# Altium PCB AnchorBoardSmall_SNS.PcbDoc (part 1 of 2)
Units mm, origin at the board's own origin, x right, y up, seen from the top; angles counter-clockwise.
Board outline 52.5 x 37.5 mm, 6 copper layers (Top Layer, Ground, Mid-Layer 2, Mid-Layer 3, Power, Bottom Layer), stack 1.141 mm thick; 164 components, 143 nets, 548 pads, 294 vias.
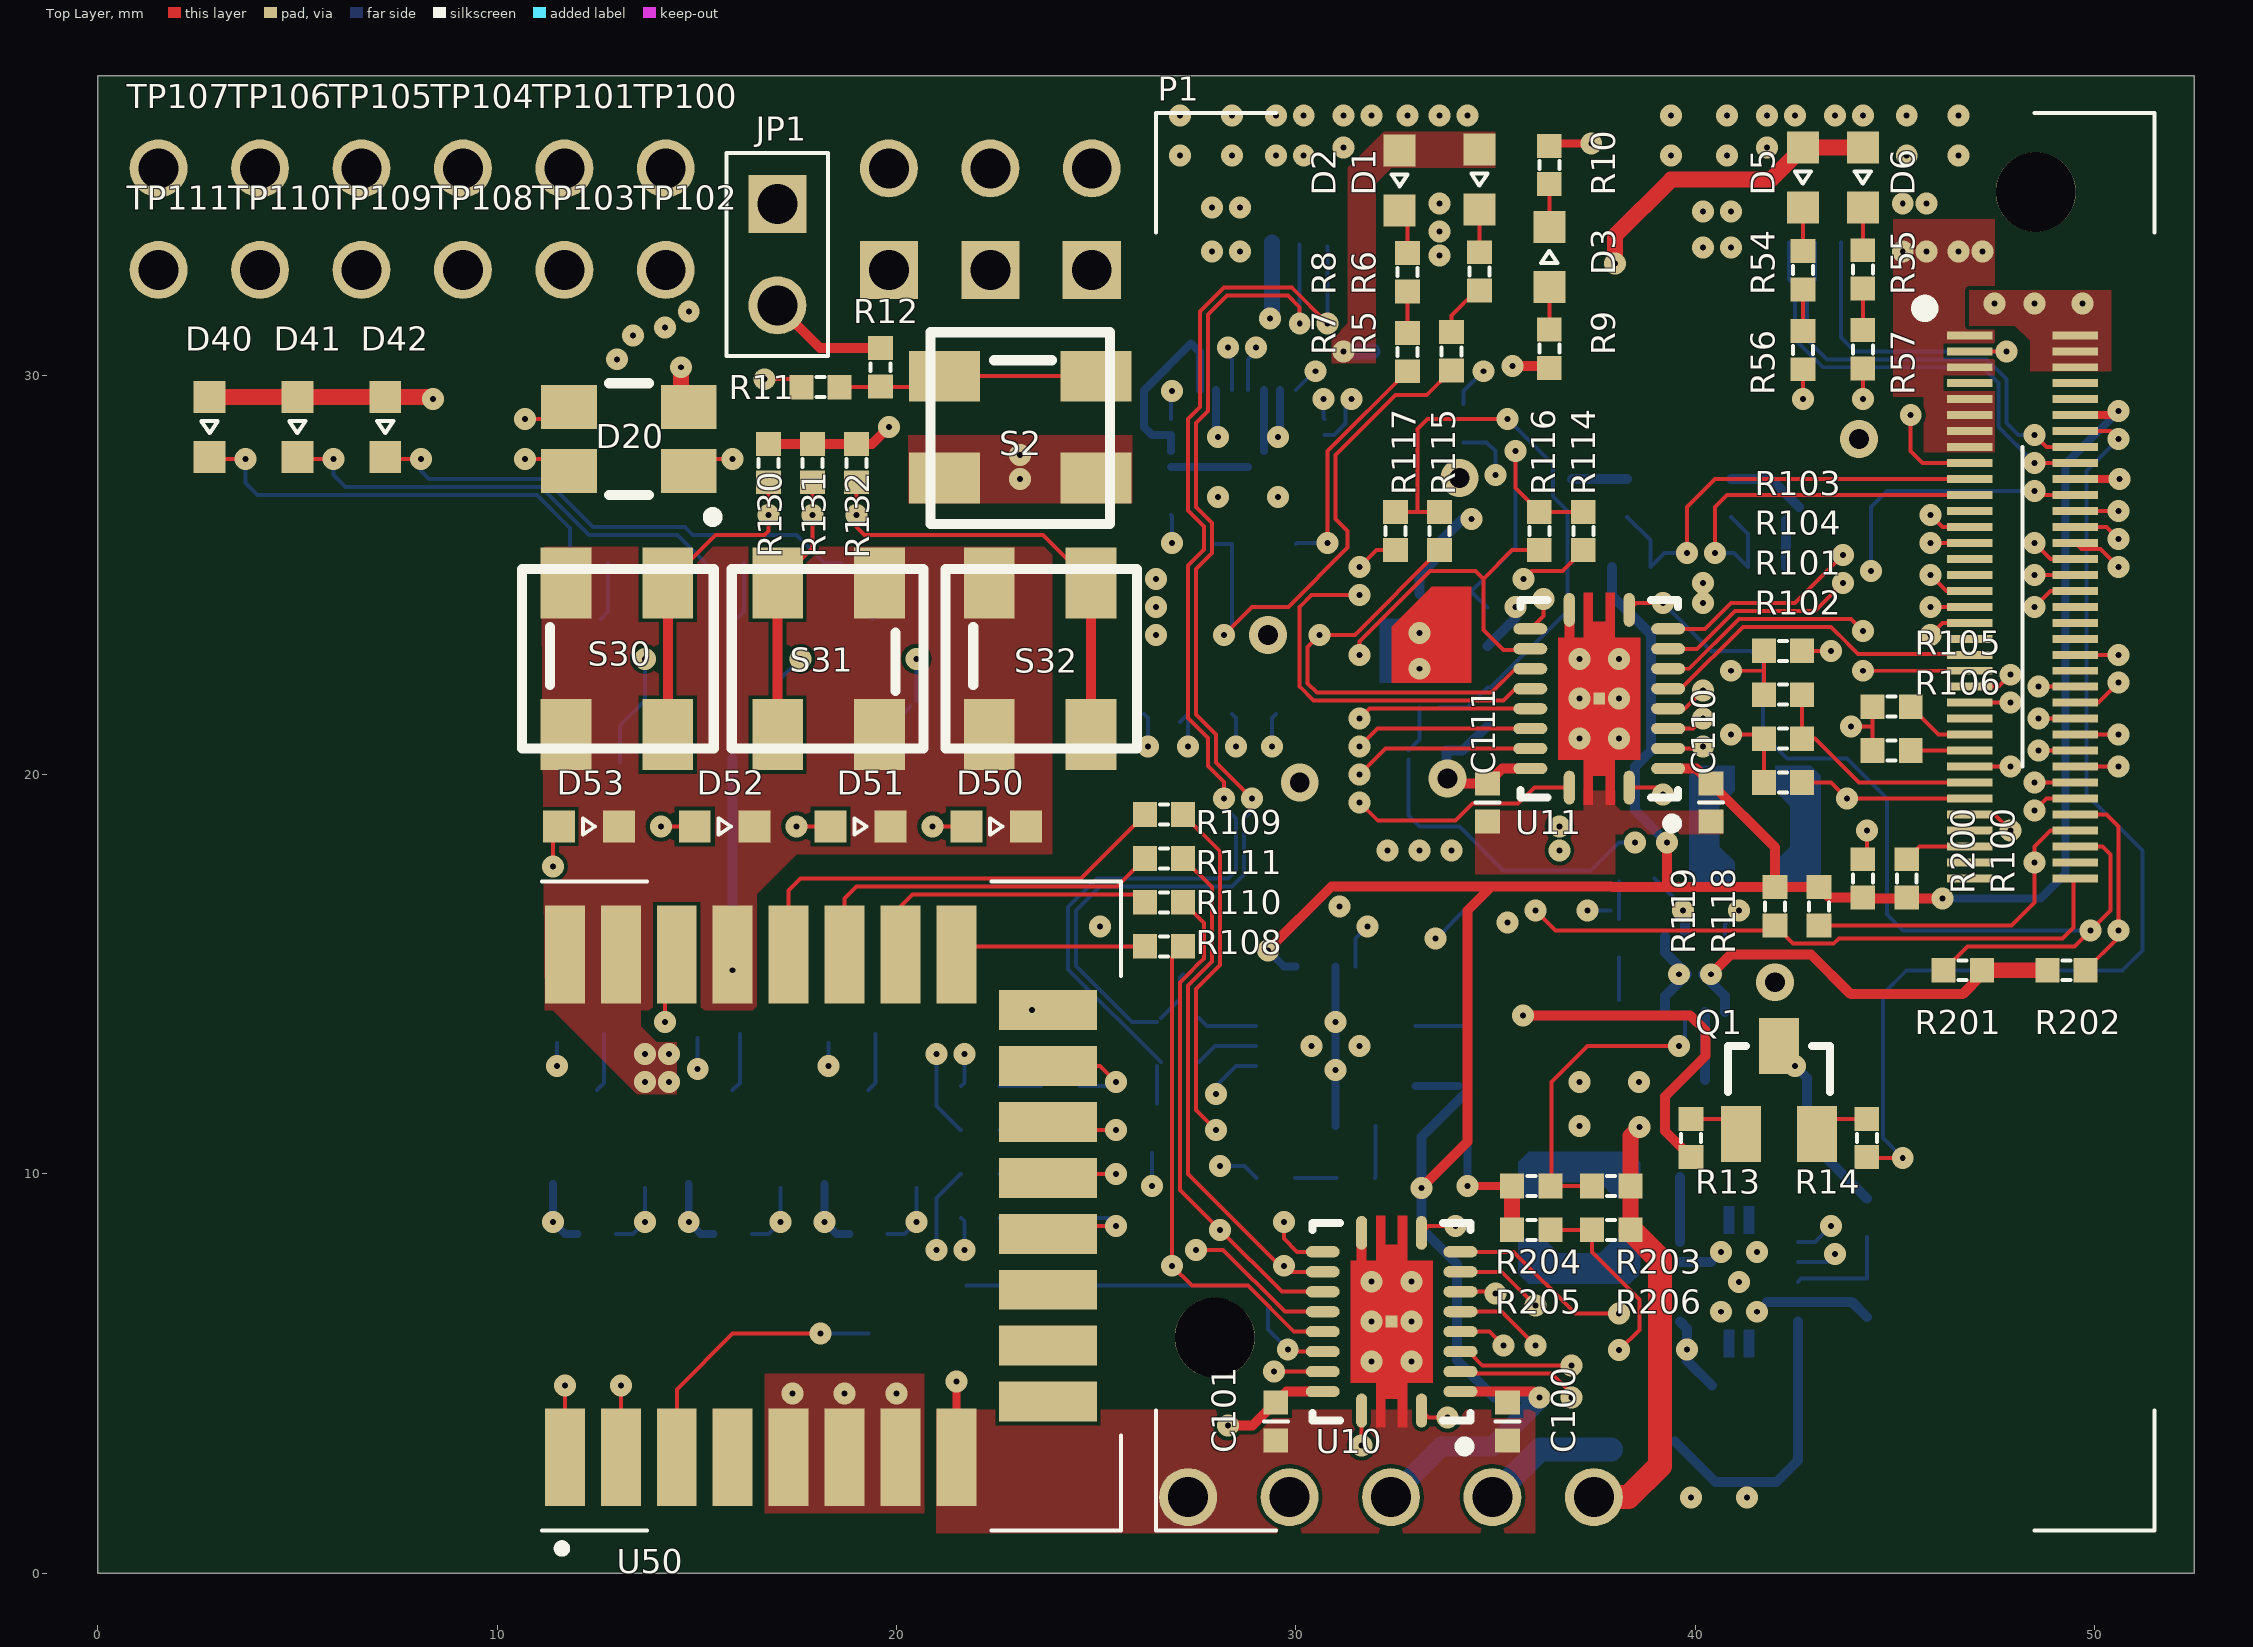
[diagram p0: Top Layer view]
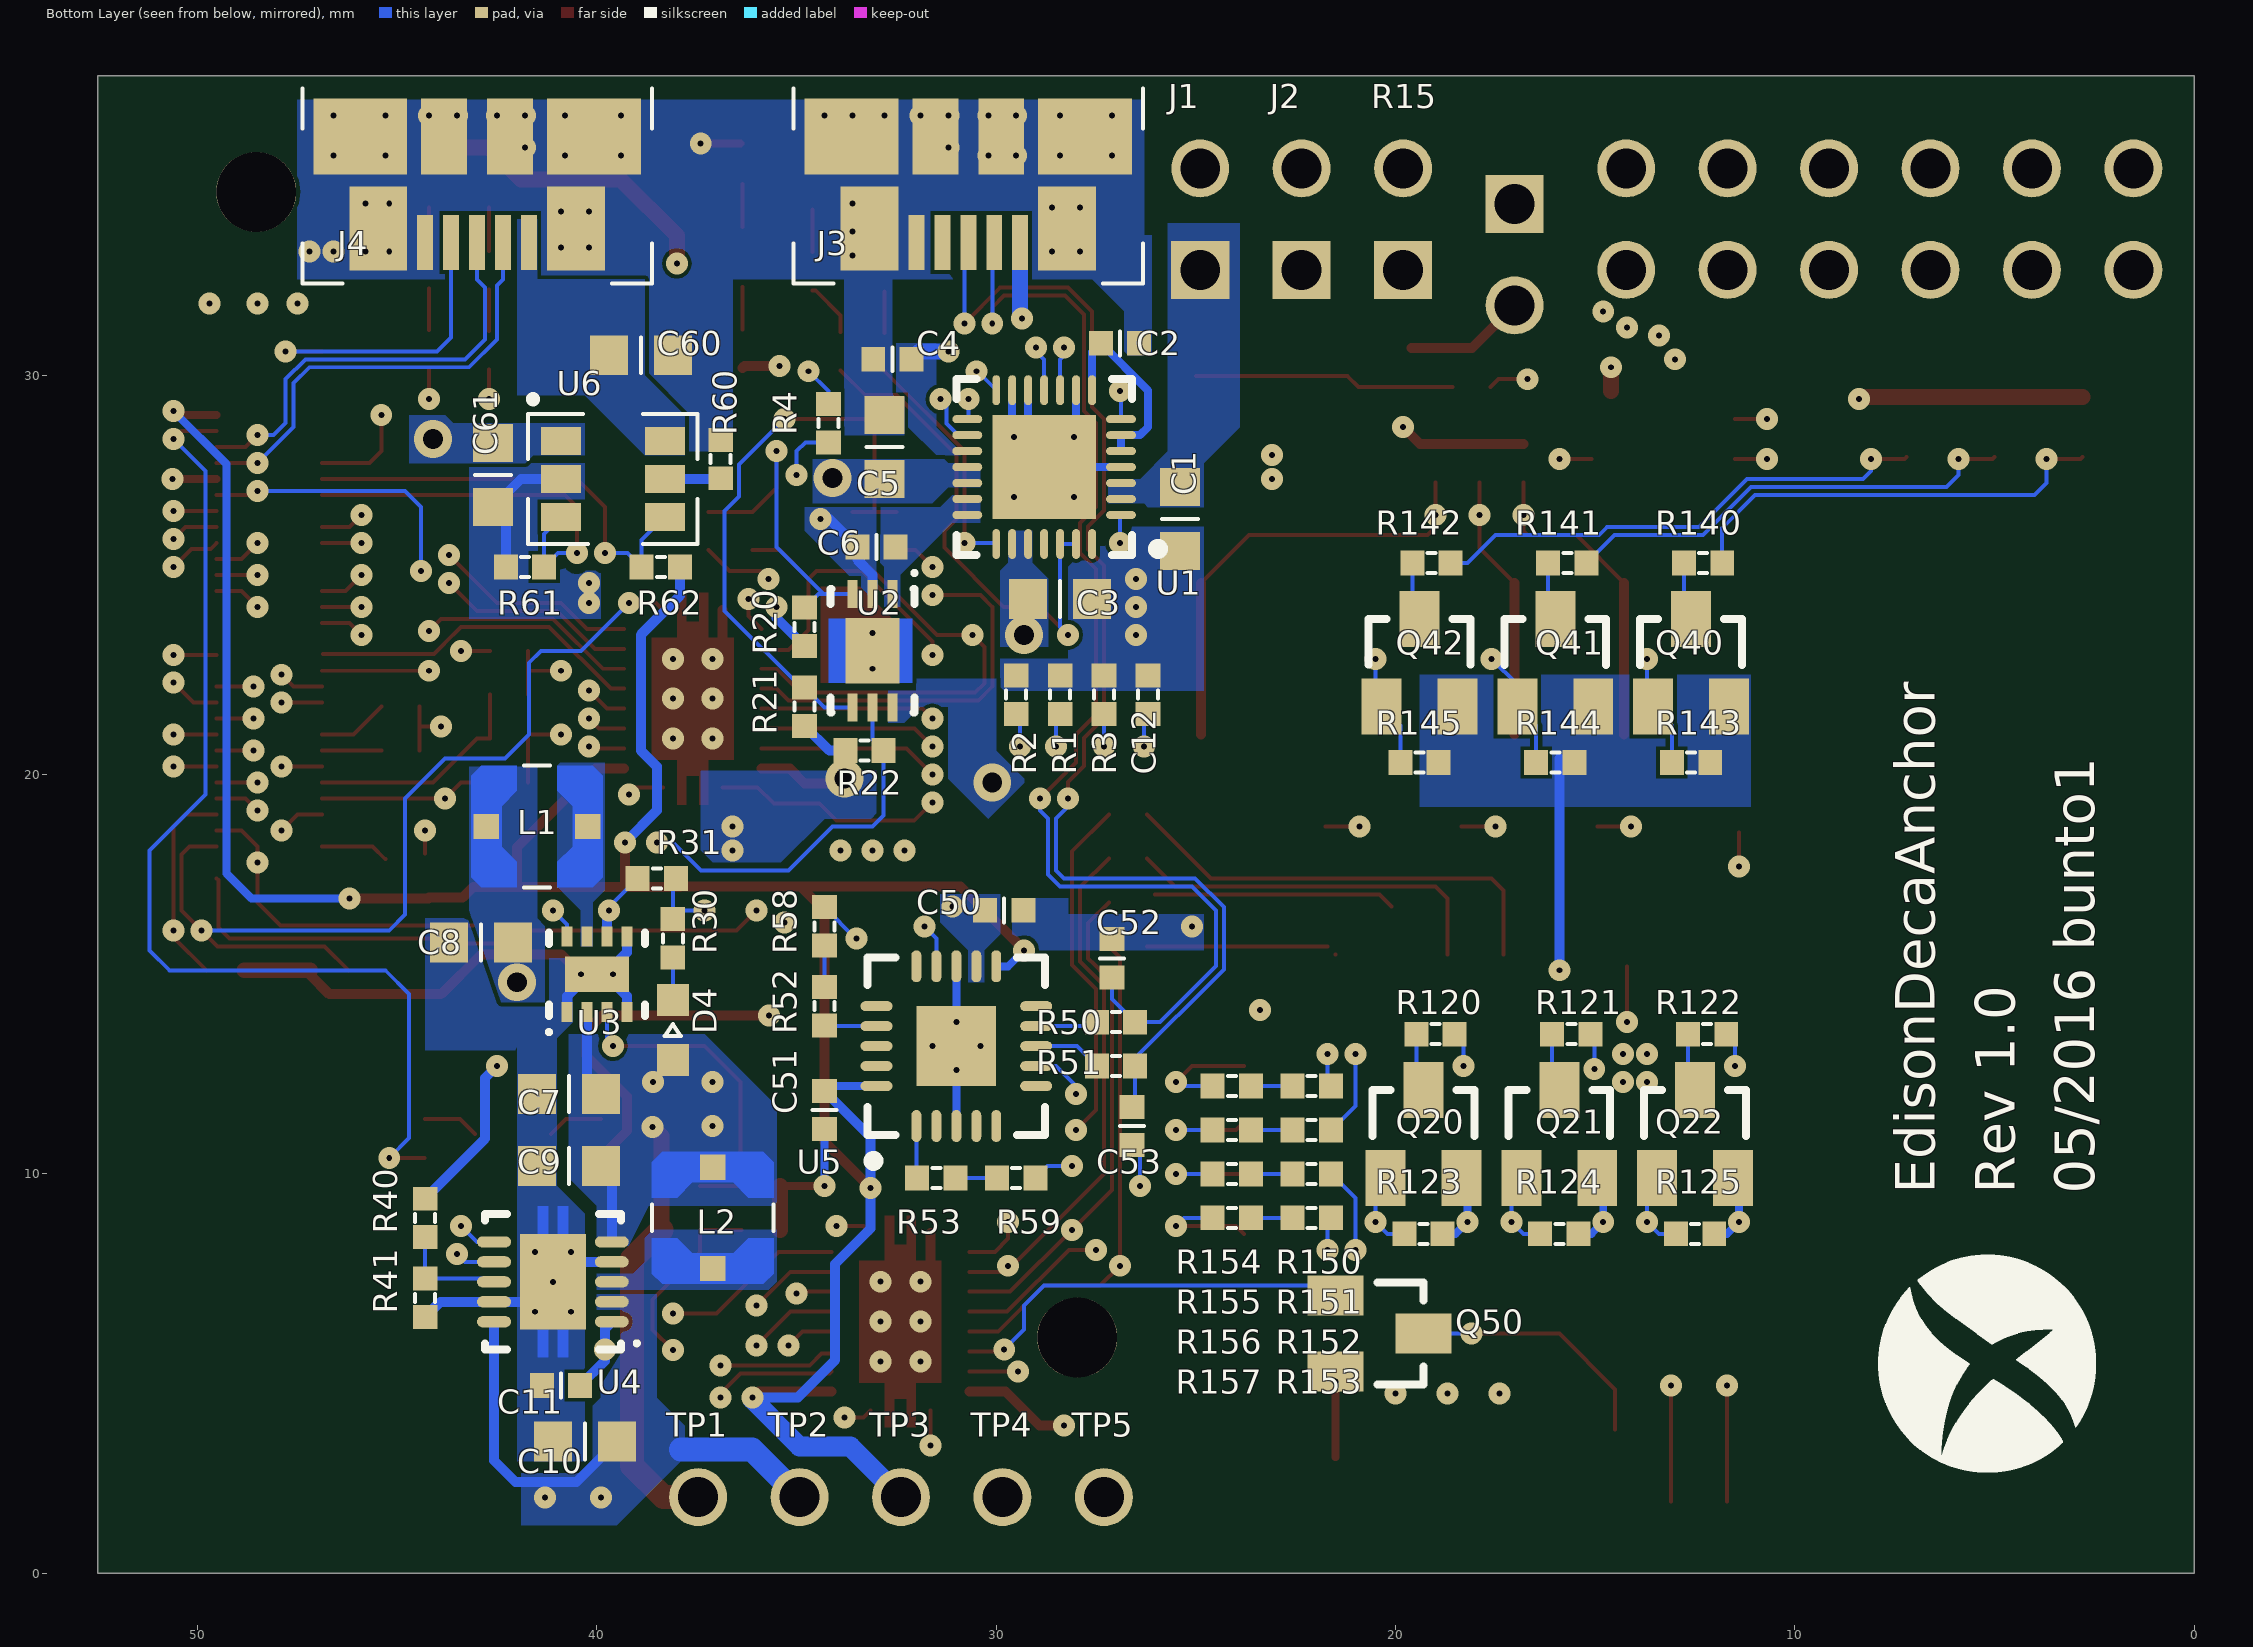
[diagram p1: Bottom Layer view, seen from below]
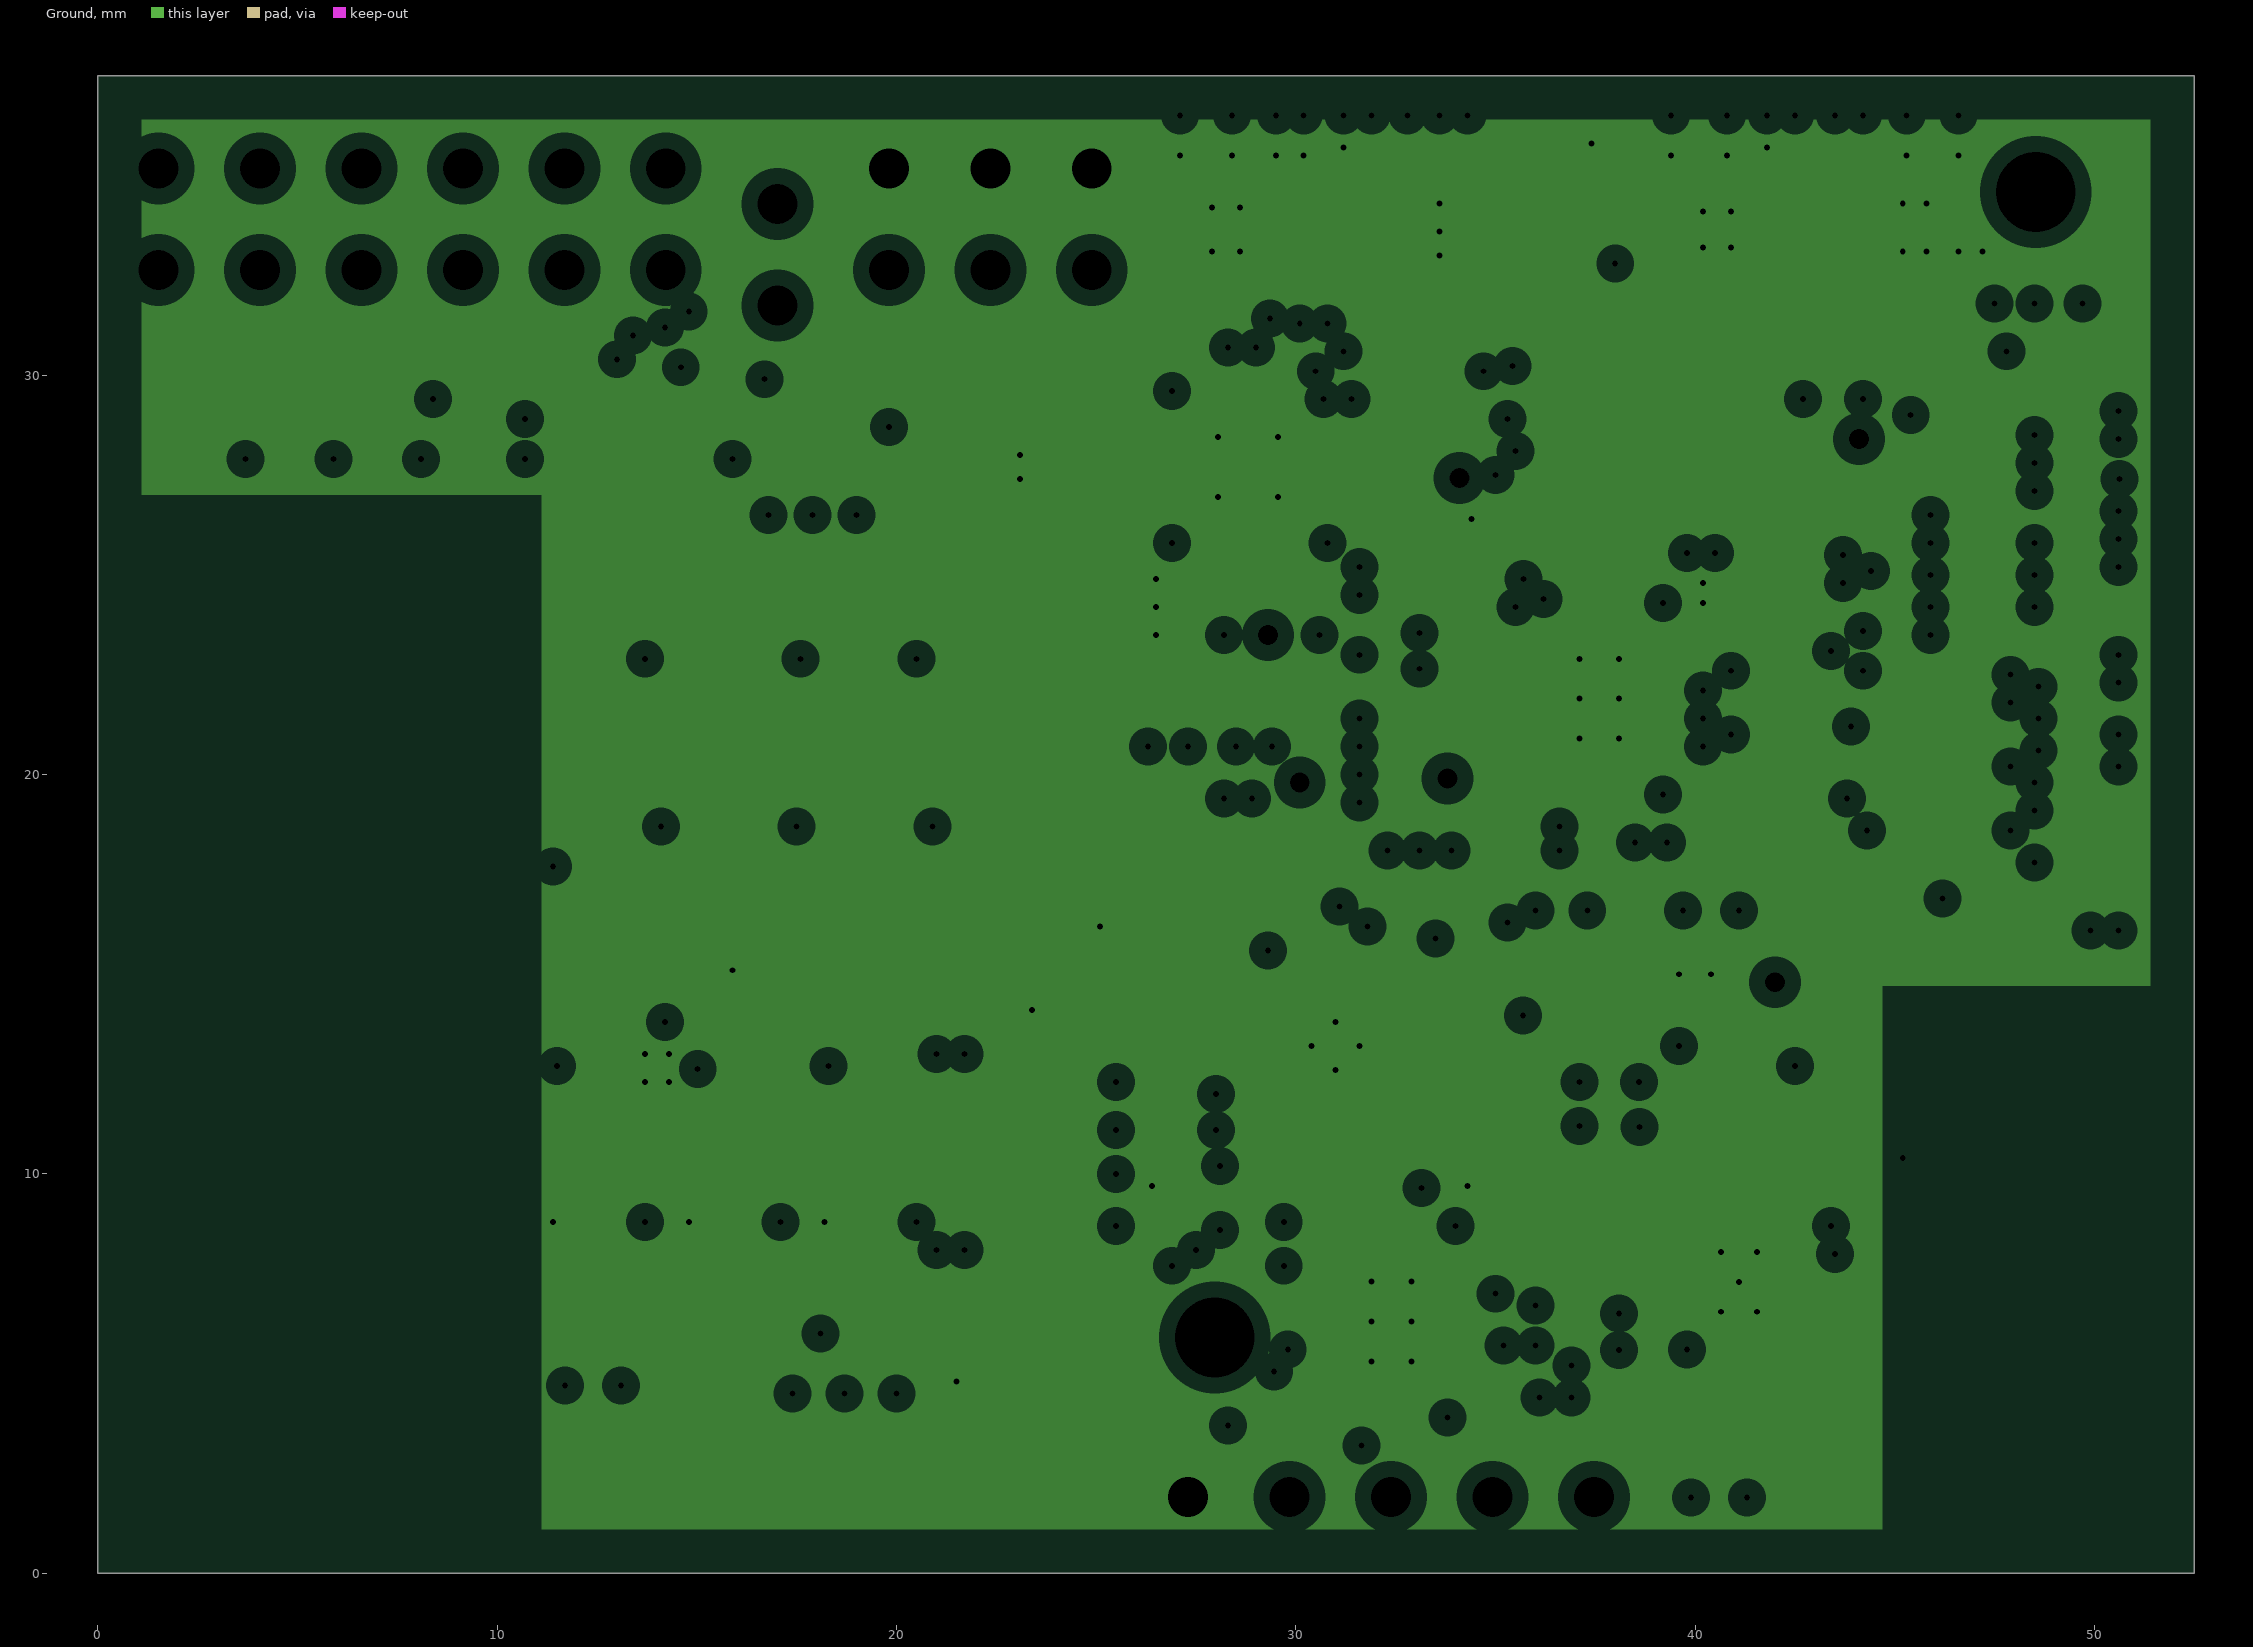
[diagram p2: Ground, clearances drawn from the general rule]
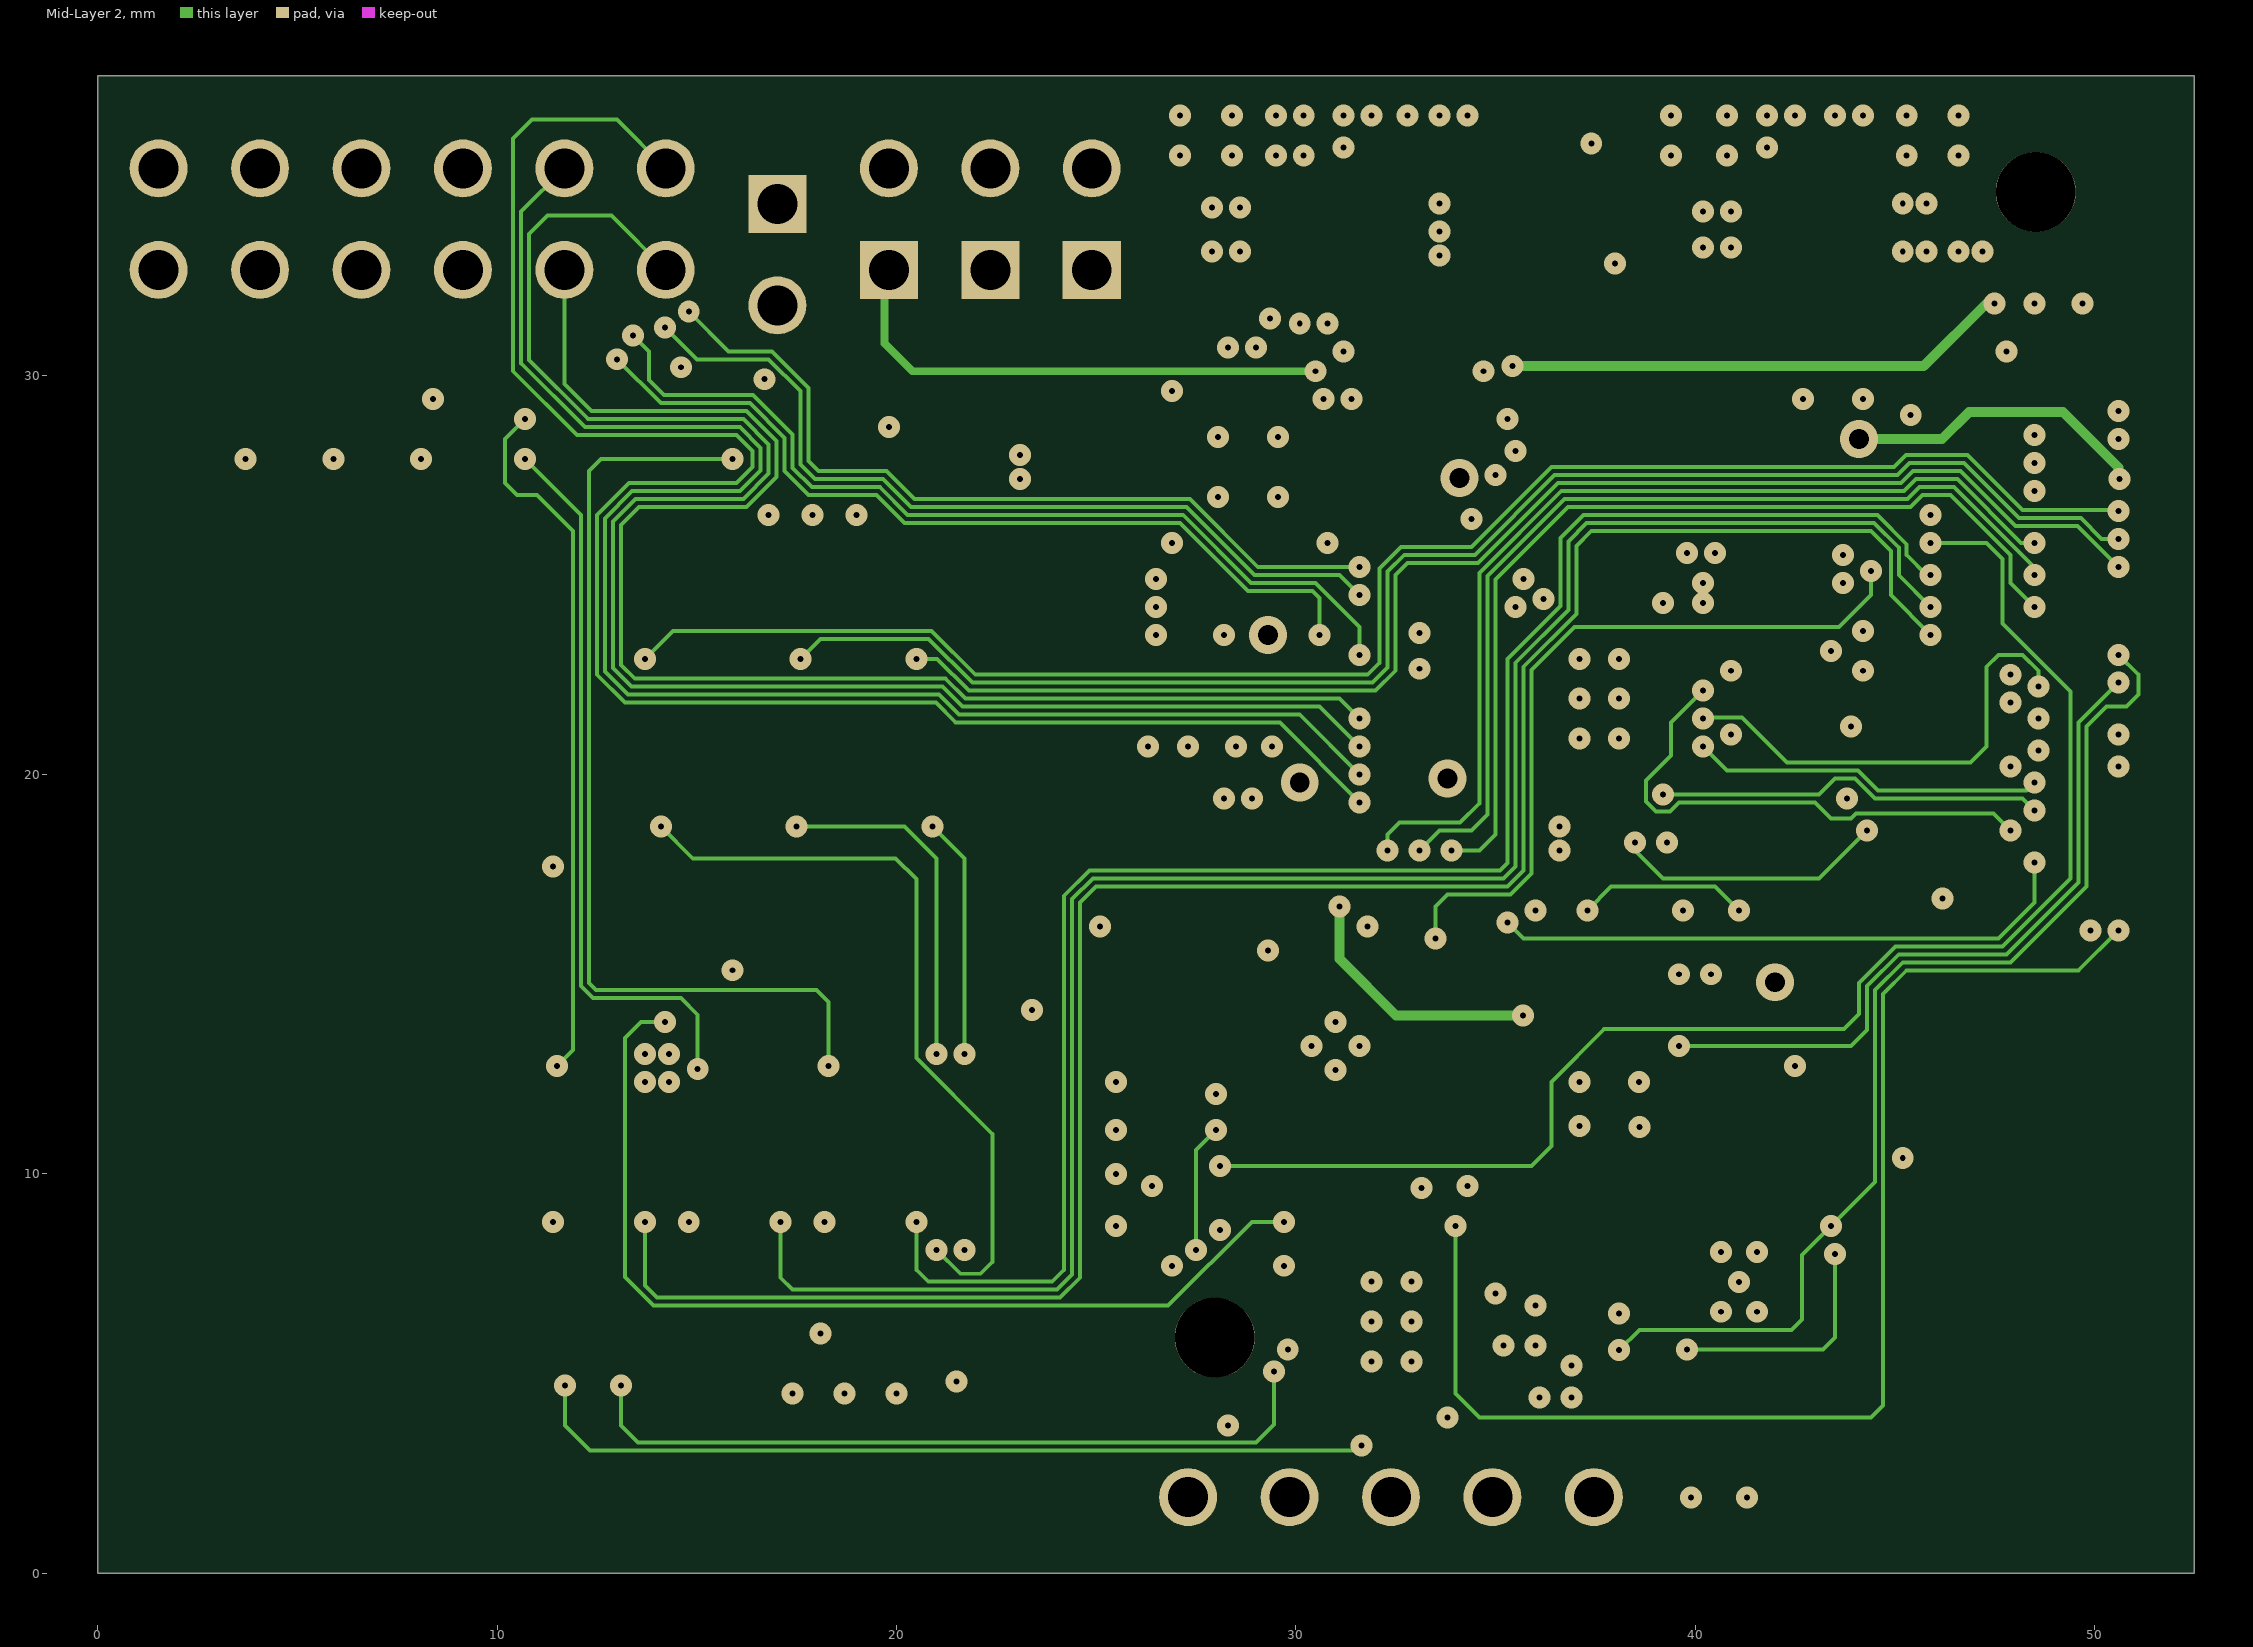
[diagram p3: Mid-Layer 2]
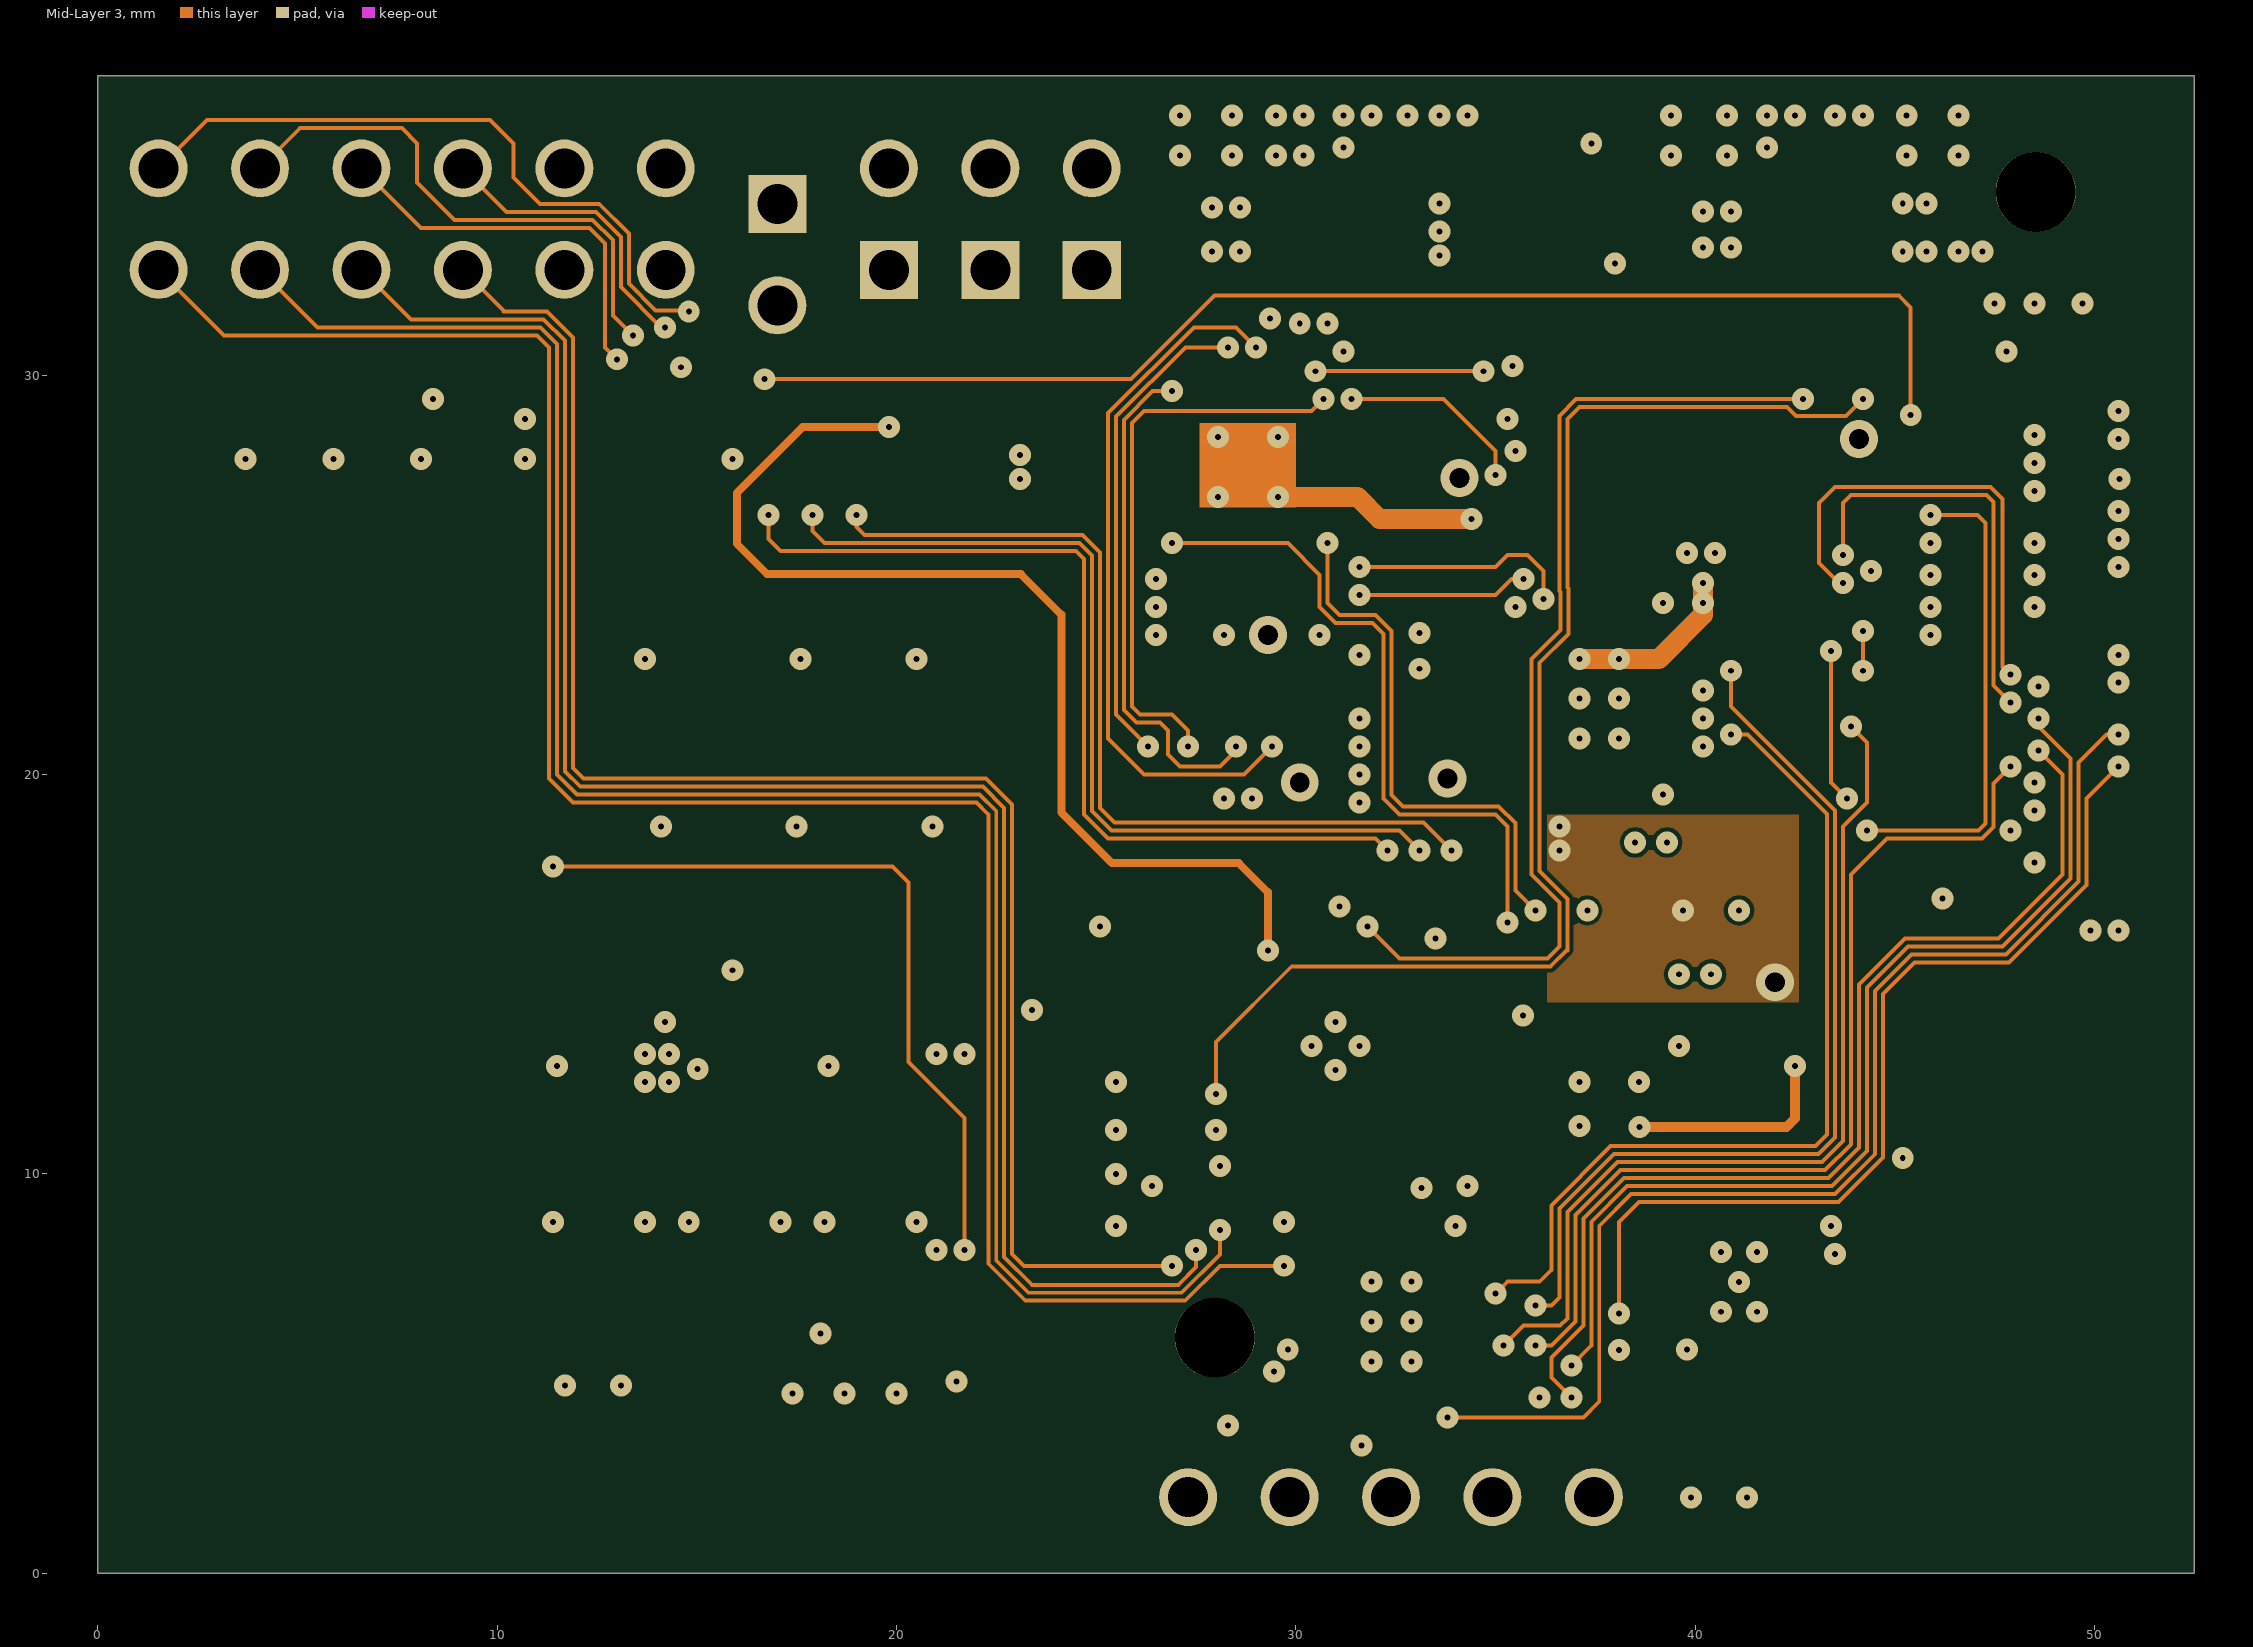
[diagram p4: Mid-Layer 3]
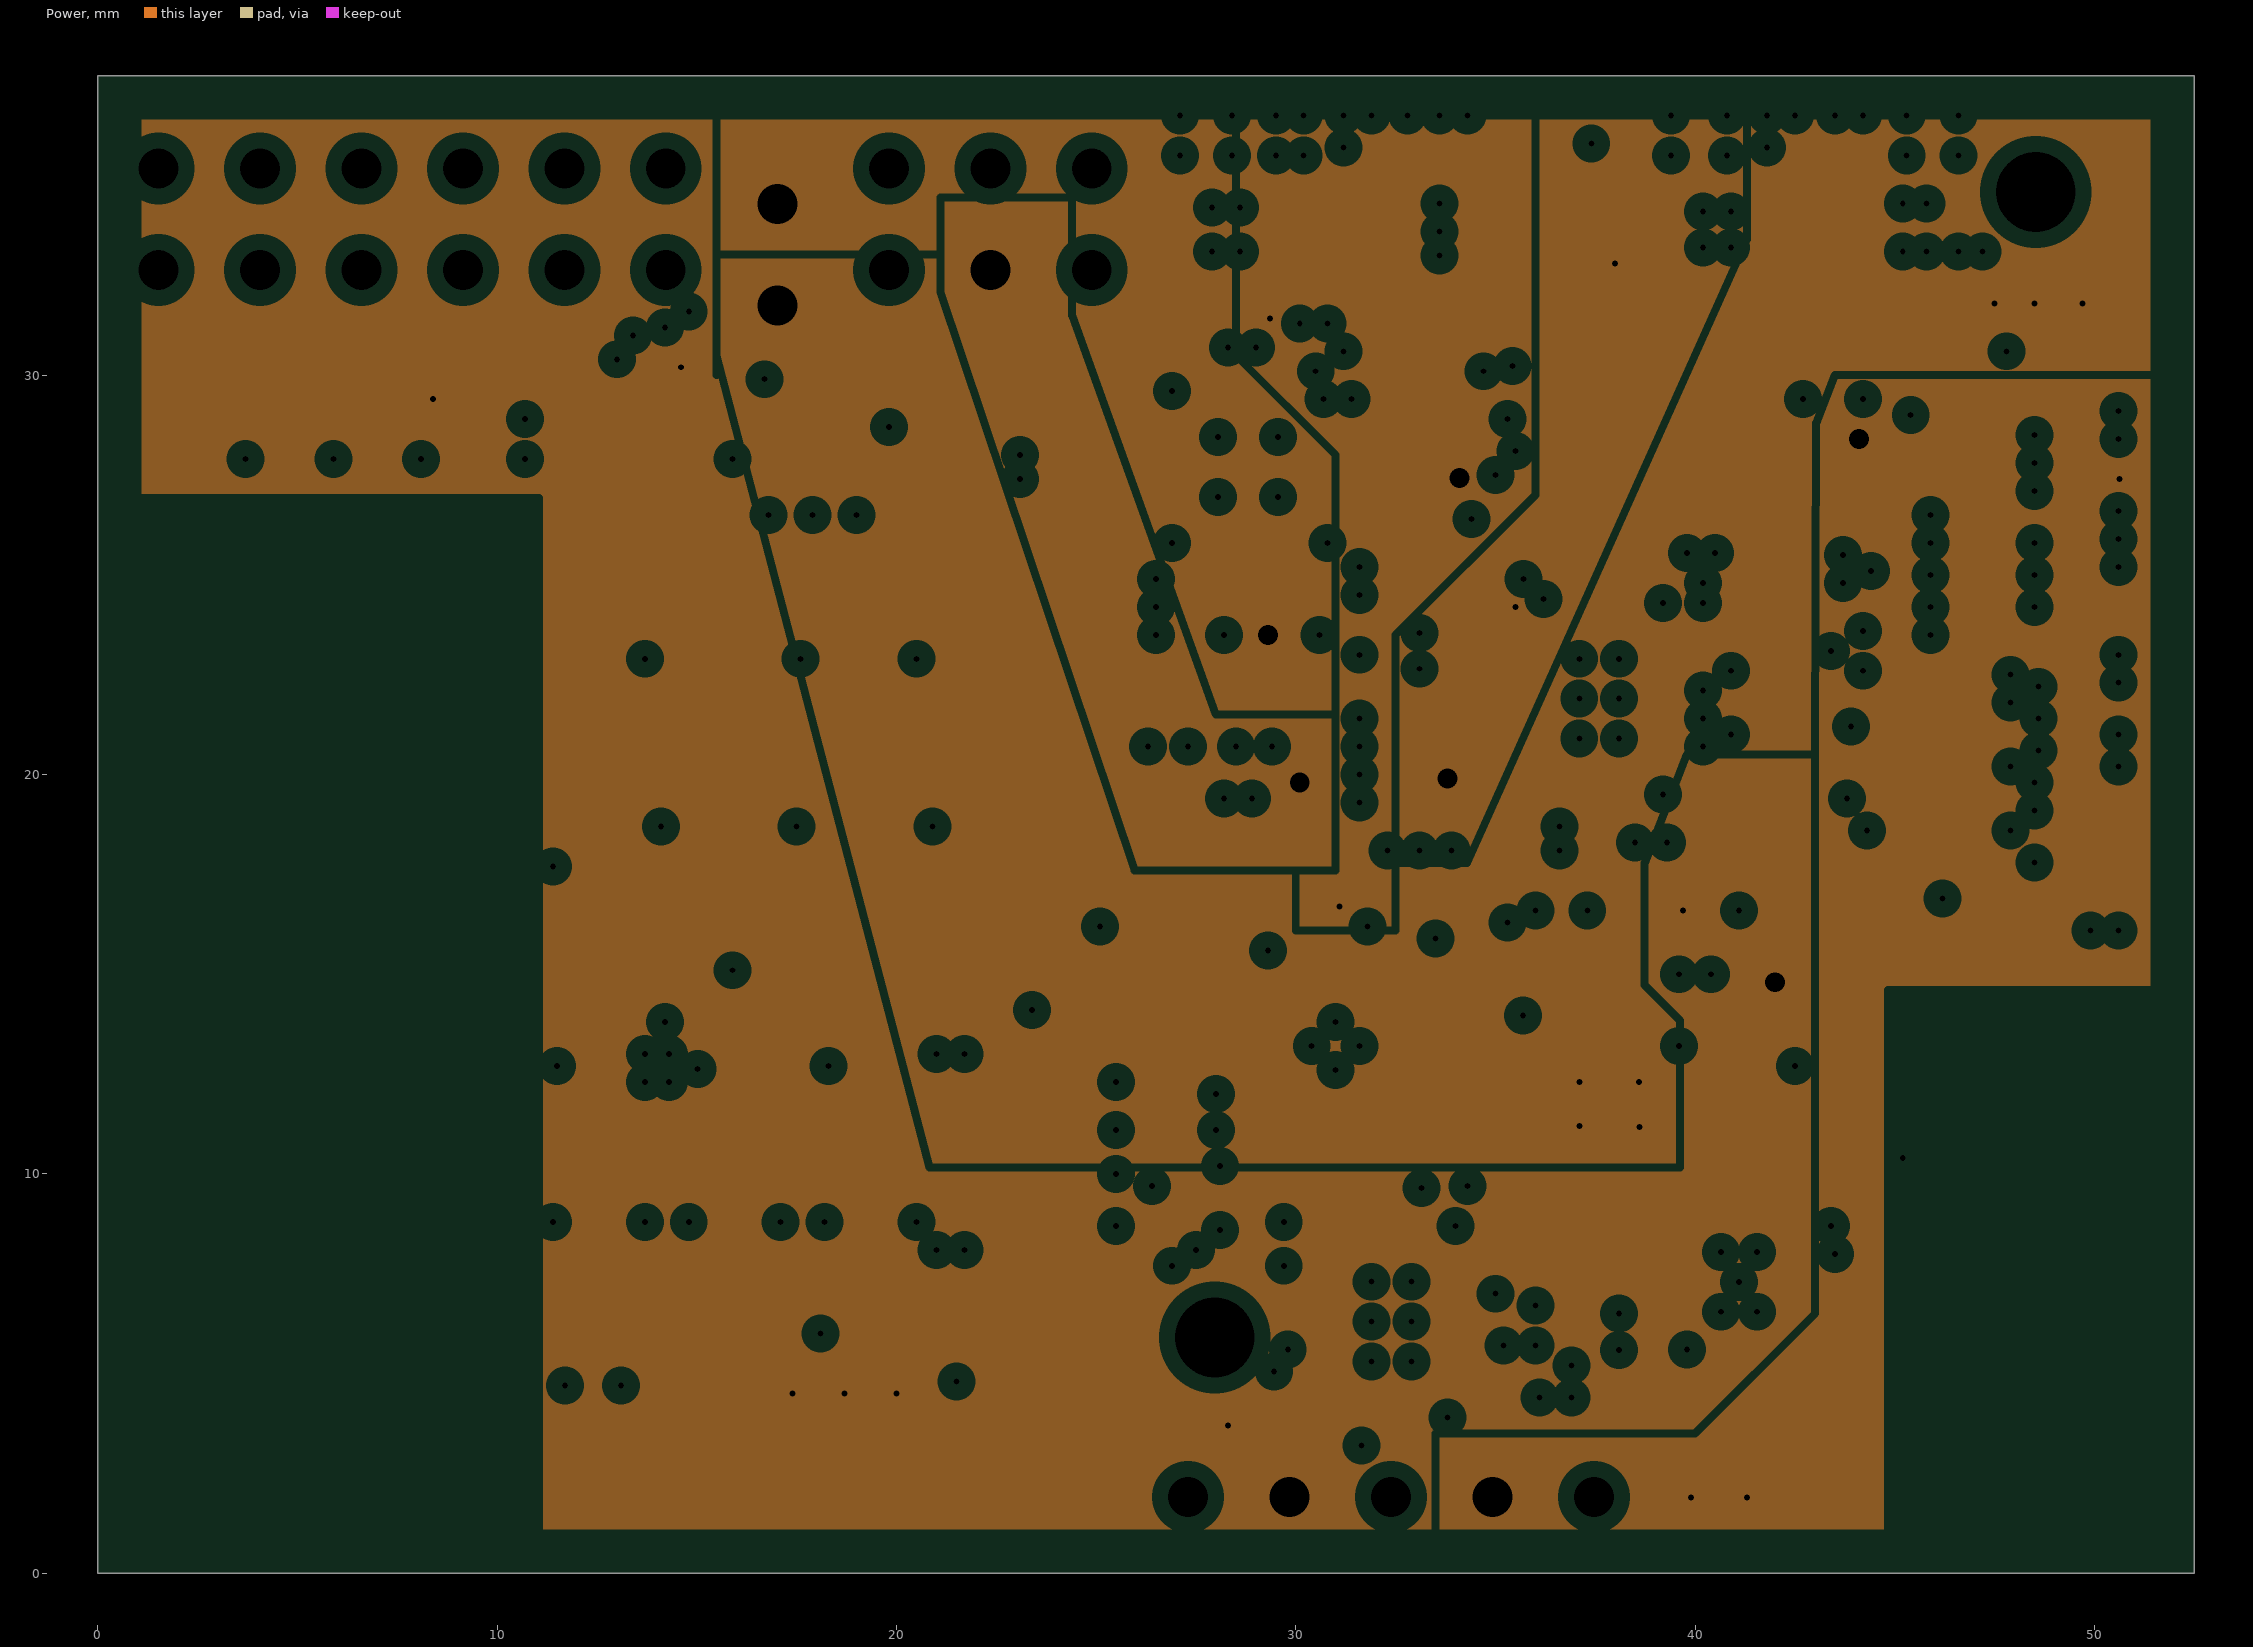
[diagram p5: Power, clearances drawn from the general rule]

## Layer stack, top to bottom
Top Solder: solder mask 0.0102, Solder Resist, Dk 3.5
Top Layer: signal copper 0.018
Dielectric1: prepreg 0.2, FR-4, Dk 4.8
Ground: plane copper 0.036
Dielectric2: core 0.254, FR-4, Dk 4.2
Mid-Layer 2: signal copper 0.0356
Dielectric3: prepreg 0.127, FR-4, Dk 4.2
Mid-Layer 3: signal copper 0.0356
Dielectric4: core 0.254, FR-4, Dk 4.2
Power: plane copper 0.036, net (Multiple Nets)
Dielectric5: prepreg 0.127, FR-4, Dk 4.2
Bottom Layer: signal copper 0.018
Bottom Solder: solder mask 0.0102, Solder Resist, Dk 3.5

## Board outline
0,0 0,37.5 52.5,37.5 52.5,0

## Design rules (kind name [scope] priority, off if disabled: settings)
AssemblyTestPointUsage [All] p1 off:
Clearance Clearance-xPP-xTP-xTT [All] p1: gap=0.1
ComponentClearance [All] p1: gap=0.25 collisioncheckmode=3 verticalgap=0.25 showdistances=FALSE
DiffPairsRouting [All] p1: maxlimit=0.25 minlimit=0.25 mostfreqgap=0.25 toplayer_minwidth=0.381 toplayer_maxwidth=0.381 toplayer_prefwidth=0.381 midlayer2_minwidth=0.381 midlayer2_maxwidth=0.381 midlayer2_prefwidth=0.381 midlayer3_minwidth=0.381 midlayer3_maxwidth=0.381 midlayer3_prefwidth=0.381 bottomlayer_minwidth=0.381 bottomlayer_maxwidth=0.381 bottomlayer_prefwidth=0.381 maxuncoupledlength=12.5
FabricationTestPointUsage [All] p1 off: valid=0 allowmultiple=FALSE
Height [All] p1: minheight=0 maxheight=25 prefheight=12.5
HoleSize HoleSize-PTH [All] p1: absolutevalues=TRUE maxlimit=2 minlimit=0.15 maxpercent=80.000 minpercent=20.000
HoleToHoleClearance [All] p1: gap=0.15 allowstackedmicrovias=TRUE
MinimumAnnularRing "Minimum IAR  <= 0.45mm" [((ObjectKind = 'Pad') OR (ObjectKind = 'Via')) And (Layer = 'MultiLayer') And (HoleDiameter <= AsMM(0.45))] p1: minimumring=0.2 // minimum inner annular ring for pads <= 0.45mm finished hole size
MinimumAnnularRing "Minimum IAR  > 0.45mm" [((ObjectKind = 'Pad') OR (ObjectKind = 'Via')) And (Layer = 'MultiLayer') And (HoleDiameter > AsMM(0.45))] p2: minimumring=0.225 // minimum inner annular ring for pads > 0.45mm finished hole size
MinimumAnnularRing Minimum-IAR [All] p3: minimumring=0.2
MinimumSolderMaskSliver [All] p1: minsoldermaskwidth=0.06
PlaneClearance PlaneClearance-IPI [All] p1: clearance=0.4
PlaneConnect [All] p1: planeconnectstyle=Direct reliefexpansion=0.4 reliefentries=4 reliefconductorwidth=0.4 reliefairgap=0.2
PolygonConnect PolygonConnect_Power [InNetClass('Power')] p1: connectstyle=Direct reliefconductorwidth=0.254 reliefentries=4 polygonreliefangle="90 Angle" airgapwidth=0.254
PolygonConnect PolygonConnect-xTW [All] p2: connectstyle=Relief reliefconductorwidth=0.2 reliefentries=4 polygonreliefangle="90 Angle" airgapwidth=0.254
RoutingCorners [All] p1: cornerstyle=45-Degree minsetback=2.5 maxsetback=2.5
RoutingVias "RoutingVias <= 0.45mm" [(ObjectKind = 'Via') And (HoleDiameter <= AsMM(0.45))] p1: holewidth=0.2 width=0.6 viastyle="Through Hole" minholewidth=0.15 minwidth=0.55 maxholewidth=0.3 maxwidth=0.7
RoutingVias "RoutingVias > 0.45mm" [(ObjectKind = 'Via') And (HoleDiameter > AsMM(0.45))] p2: holewidth=0.5 width=0.95 viastyle="Through Hole" minholewidth=0.45 minwidth=0.9 maxholewidth=0.9 maxwidth=1.35
SilkToSilkClearance [All] p1 off: silktosilkclearance=0.2
SilkToSolderMaskClearance SilkscreenOverComponentPads [IsPad] p1 off: minsilkscreentomaskgap=0.2 clearancetoexposedcopper=TRUE
SolderMaskExpansion [All] p1: expansion=0.06
Width Width-xTW [All] p1: maxlimit=1.5 minlimit=0.1 preferedwidth=0.2
17 further rules are at their usual default settings.

## Classes and differential pairs
component class AnchorBoard_SNS_Power: C1 C2 C3 C4 C5 C6 C7 C8 C9 C10 C11 C12 C50 C51 C52 C53 C60 C61 D1 D2 D3 D4 D5 D6 J1 J2 J3 J4 JP1 L1 L2 Q1 R1 R2 R3 R4 R5 R6 R7 R8 R9 R10 R11 R12 R13 R14 R15 R20 R21 R22 R30 R31 R40 R41 R50 R51 R52 R53 R54 R55 R56 R57 R58 R59 R60 R61 R62 S2 TP1 TP2 TP4 U1 U2 U3 U4 U5 U6
component class AnchorBoard_SNS_Edison: C100 C101 C110 C111 D20 D41 D50 D51 D52 D53 P1 Q20 Q21 Q22 Q40 Q41 Q42 Q50 R100 R101 R102 R103 R104 R105 R106 R108 R109 R110 R111 R114 R115 R116 R117 R118 R119 R120 R121 R122 R123 R124 R125 R130 R131 R132 R140 R141 R142 R143 R144 R145 R150 R151 R152 R153 R154 R155 R156 R157 R200 R201 R202 R203 R204 R205 R206 S30 S31 S32 TP100 TP101 TP102 TP103 TP104 TP105 TP106 TP107 TP108 TP109 TP110 TP111 U10 U11
net class Power: 1V8 3V3 5V GND NetC1_2 NetC2_2 NetC3_2 NetC11_2 NetC60_2 NetJ2_1 NetL1_1 NetL2_2 V_BATT V_CHG_USB V_LDO VSYS

## Components (designator, comment, footprint, x,y, rotation, side; value= is the part's Value field where it differs from the comment)
C1 "10uF" CAPC1608X80 25.4,26.4 r90 bottom
C2 "100nF" CAPC1005X50 26.9,30.8 r0 bottom
C3 "10uF" CAPC1608X80 28.4,24.4 r0 bottom
C4 "1uF" CAPC1005X50 32.6,30.4 r180 bottom
C5 "4.7uF" CAPC1608X80 32.8,28.2 r270 bottom
C6 "100nF" CAPC1005X50 33,25.7 r180 bottom
C7 "10uF" CAPC1608X80 40.7,12 r180 bottom
C8 "22uF" CAPC1608X80 42.9,15.8 r180 bottom
C9 "10uF" CAPC1608X80 40.7,10.2 r180 bottom
C10 "22uF" CAPC1608X80 40.3,3.3 r180 bottom
C11 "1uF" CAPC1005X50 40.9,4.7 r180 bottom
C12 "NCC" RESC1005X35 26.2,22 r270 bottom
C50 "100nF" CAPC1005X50 29.8,16.6 r0 bottom
C51 "100nF" CAPC1005X50 34.3,11.6 r90 bottom
C52 "47pF" CAPC1005X50 27.1,15.4 r270 bottom
C53 "47pF" CAPC1005X50 26.6,11.2 r90 bottom
C60 "10uF" CAPC1608X80 38.9,30.5 r0 bottom
C61 "10uF" CAPC1608X80 42.6,27.5 r90 bottom
C100 "100nF" CAPC1005X50 35.3,3.8 r90 top
C101 "100nF" CAPC1005X50 29.5,3.8 r90 top
C110 "100nF" CAPC1005X50 40.4,19.3 r90 top
C111 "100nF" CAPC1005X50 34.8,19.3 r90 top
D1 "green" LEDM1608X80 34.6,34.9 r270 top
D2 "red" LEDM1608X80 32.6,34.88 r270 top
D3 "blue" LEDM1608X80 36.35,32.965 r90 top
D4 "red" LEDM1608X80 38.1,13.6 r90 bottom
D5 "yellow" LEDM1608X80 42.7,34.95 r270 top
D6 "orange" LEDM1608X80 44.2,34.95 r270 top
D20 "RGB LED" PLCC160P350X280X190-4 13.3,28.4 r180 top
D40 "green" LEDM1608X80 2.8,28.7 r270 top
D41 "orange" LEDM1608X80 5,28.7 r270 top
D42 "red" LEDM1608X80 7.2,28.7 r270 top
D50 "green" LEDM1608X80 22.5,18.7 r0 top
D51 "red" LEDM1608X80 19.1,18.7 r0 top
D52 "yellow" LEDM1608X80 15.7,18.7 r0 top
D53 "orange" LEDM1608X80 12.3,18.7 r0 top
J1 "DC In" ACCU_PORT 24.892,33.909 r0 bottom
J2 "Accu" ACCU_PORT 22.352,33.909 r0 bottom
J3 "USB Charge / UART" MOLEX_0473460001 30.7,36.3 r270 bottom
J4 "Edison USB OTG Port" MOLEX_0473460001 43,36.3 r270 bottom
JP1 "JUMPER" HDR1X2_V_M 17.018,34.29 r270 top
L1 "2.2uH" INDM2929X140 41.5,18.7 r0 bottom
L2 "2.2uH" INDM2929X140 37.1,8.9 r270 bottom
P1 "Intel Edison" HDRV70W12P40_2X35_Edison 48.2,24.2 r0 top
Q1 "FDV301N" SOT190P360X120-3 42.1,12.1 r0 top
Q20 "FDV301N" SOT190P360X120-3 19.3,11 r180 bottom
Q21 "FDV301N" SOT190P360X120-3 15.9,11 r180 bottom
Q22 "FDV301N" SOT190P360X120-3 12.5,11 r180 bottom
Q40 "FDV301N" SOT190P360X120-3 12.6,22.8 r180 bottom
Q41 "FDV301N" SOT190P360X120-3 16,22.8 r180 bottom
Q42 "FDV301N" SOT190P360X120-3 19.4,22.8 r180 bottom
Q50 "FDV301N" SOT190P360X120-3 20.4,6 r270 bottom
R1 "1K5" RESC1005X35 28.4,22 r90 bottom
R2 "3K" RESC1005X35 29.5,22 r90 bottom
R3 "0R" RESC1005X35 27.3,22 r270 bottom
R4 "NC" RESC1005X35 34.2,28.8 r270 bottom
R5 "0R" RESC1005X35 33.9,30.6 r90 top
R6 "68R" RESC1005X35 34.6,32.6 r270 top
R7 "0R" RESC1005X35 32.8,30.58 r90 top
R8 "82R" RESC1005X35 32.8,32.58 r90 top
R9 "0R" RESC1005X35 36.35,30.665 r90 top
R10 "68R" RESC1005X35 36.35,35.265 r90 top
R11 "220R" RESC1005X35 18.1,29.7 r0 top
R12 "20K" RESC1005X35 19.6,30.2 r270 top
R13 "1K" RESC1005X35 39.9,10.9 r90 top
R14 "0R" RESC1005X35 44.3,10.9 r270 top
R15 "NTC" ACCU_PORT 19.812,33.909 r0 bottom
R20 "2K" RESC1005X35 34.8,23.7 r90 bottom
R21 "2K" RESC1005X35 34.8,21.7 r90 bottom
R22 "2K" RESC1005X35 33.3,20.6 r180 bottom
R30 "220R" RESC1005X35 38.1,15.9 r90 bottom
R31 "100K" RESC1005X35 38.5,17.4 r0 bottom
R40 "NC" RESC1005X35 44.302,8.898 r90 bottom
R41 "0R" RESC1005X35 44.302,6.898 r90 bottom
R50 "27R" RESC1005X35 27,13.8 r0 bottom
R51 "27R" RESC1005X35 27,12.7 r0 bottom
R52 "100R" RESC1005X35 34.3,14.2 r270 bottom
R53 "100R" RESC1005X35 31.5,9.9 r0 bottom
R54 "68R" RESC1005X35 42.7,32.63 r270 top
R55 "68R" RESC1005X35 44.2,32.65 r90 top
R56 "0R" RESC1005X35 42.7,30.63 r90 top
R57 "0R" RESC1005X35 44.2,30.65 r90 top
R58 "0R" RESC1005X35 34.3,16.2 r90 bottom
R59 "0R" RESC1005X35 29.5,9.9 r180 bottom
R60 "287R" RESC1005X35 36.9,27.9 r90 bottom
R61 "100K" RESC1005X35 41.8,25.2 r0 bottom
R62 "20K" RESC1005X35 38.4,25.2 r0 bottom
R100 "0R" RESC1005X35 45.3,17.4 r270 top
R101 "0R" RESC1005X35 42.2,20.9 r0 top
R102 "NC" RESC1005X35 42.2,19.8 r0 top
R103 "0R" RESC1005X35 42.2,23.1 r0 top
R104 "NC" RESC1005X35 42.2,22 r0 top
R105 "0R" RESC1005X35 44.92,21.7 r180 top
R106 "NC" RESC1005X35 44.92,20.6 r180 top
R108 "0R" RESC1005X35 26.7,15.7 r180 top
R109 "0R" RESC1005X35 26.7,19 r180 top
R110 "0R" RESC1005X35 26.7,16.8 r180 top
R111 "0R" RESC1005X35 26.7,17.9 r180 top
R114 "0R" RESC1005X35 37.2,26.1 r90 top
R115 "0R" RESC1005X35 33.6,26.1 r90 top
R116 "NC" RESC1005X35 36.1,26.1 r90 top
R117 "NC" RESC1005X35 32.5,26.1 r90 top
R118 "20K" RESC1005X35 43.1,16.7 r270 top
R119 "20K" RESC1005X35 42,16.7 r270 top
R120 "68R" RESC1005X35 19,13.5 r180 bottom
R121 "27R" RESC1005X35 15.6,13.5 r180 bottom
R122 "27R" RESC1005X35 12.2,13.5 r180 bottom
R123 "20K" RESC1005X35 19.3,8.5 r180 bottom
R124 "20K" RESC1005X35 15.9,8.5 r180 bottom
R125 "20K" RESC1005X35 12.5,8.5 r180 bottom
R130 "20K" RESC1005X35 16.8,27.8 r270 top
R131 "20K" RESC1005X35 17.9,27.8 r270 top
R132 "20K" RESC1005X35 19,27.8 r270 top
R140 "68R" RESC1005X35 12.3,25.3 r0 bottom
R141 "68R" RESC1005X35 15.7,25.3 r0 bottom
R142 "82R" RESC1005X35 19.1,25.3 r0 bottom
R143 "20K" RESC1005X35 12.6,20.3 r180 bottom
R144 "20K" RESC1005X35 16,20.3 r180 bottom
R145 "20K" RESC1005X35 19.4,20.3 r180 bottom
R150 "68R" RESC1005X35 22.1,12.2 r180 bottom
R151 "82R" RESC1005X35 22.1,11.1 r180 bottom
R152 "68R" RESC1005X35 22.1,10 r180 bottom
R153 "68R" RESC1005X35 22.1,8.9 r180 bottom
R154 "0R" RESC1005X35 24.1,12.2 r180 bottom
R155 "0R" RESC1005X35 24.1,11.1 r180 bottom
R156 "0R" RESC1005X35 24.1,10 r180 bottom
R157 "0R" RESC1005X35 24.1,8.9 r180 bottom
R200 "20K" RESC1005X35 44.2,17.4 r90 top
R201 "100K" RESC1005X35 46.7,15.1 r0 top
R202 "100K" RESC1005X35 49.3,15.1 r180 top
R203 "NC" RESC1005X35 37.9,9.699 r0 top
R204 "20K" RESC1005X35 35.9,9.7 r180 top
R205 "20K" RESC1005X35 35.9,8.6 r180 top
R206 "NC" RESC1005X35 37.9,8.6 r0 top
S2 "SW_SPST_PB" SW_7914J-1-000E 23.1,28.7 r270 top
S30 "SW_SPST_PB" SW_7914J-1-000E 13,22.9 r0 top
S31 "SW_SPST_PB" SW_7914J-1-000E 18.3,22.9 r180 top
S32 "SW_SPST_PB" SW_7914J-1-000E 23.6,22.9 r0 top
TP1 "V_SYS" TP_THT 37.465,1.905 r90 bottom
TP2 "V_5V" TP_THT 34.925,1.905 r90 bottom
TP3 "V_1V8" TP_THT 32.385,1.905 r90 bottom
TP4 "V_3V3" TP_THT 29.845,1.905 r90 bottom
TP5 "GND" TP_THT 27.305,1.905 r90 bottom
TP100 "GPIO_0" TP_THT 14.224,35.179 r90 top
TP101 "GPIO_1" TP_THT 11.684,35.179 r90 top
TP102 "USART_RX" TP_THT 14.224,32.639 r90 top
TP103 "USART_TX" TP_THT 11.684,32.639 r90 top
TP104 "I2C1_SCL" TP_THT 9.144,35.179 r90 top
TP105 "I2C1_SDA" TP_THT 6.604,35.179 r90 top
TP106 "I2C6_SCL" TP_THT 4.064,35.179 r90 top
TP107 "I2C6_SDA" TP_THT 1.524,35.179 r90 top
TP108 "SPI_CS" TP_THT 9.144,32.639 r90 top
TP109 "SPI_SCK" TP_THT 6.604,32.639 r90 top
TP110 "SPI_MOSI" TP_THT 4.064,32.639 r90 top
TP111 "SPI_MISO" TP_THT 1.524,32.639 r90 top
U1 "MAX8934E" QFN40P40X40X80-29 28.8,27.7 r0 bottom
U2 "LTC2941-1" DFN30X20X80-6 33.1,23.1 r270 bottom
U3 "TPS62162" SON50P210X210X80-9 40,15 r90 bottom
U4 "TPS61202" SON50P310X310X100-11 41.102,7.298 r0 bottom
U5 "FT231XQ" QFN50P40X40X80-21 31,13.2 r90 bottom
U6 "MIC2039EYM6-TR" SOT95P360X130-6 39.6,27.4 r270 bottom
U10 "TXB0108RGYR" QFN50P47X37X100-21 32.4,6.3 r180 top
U11 "TXB0108RGYR" QFN50P47X37X100-21 37.6,21.9 r180 top
U50 "DWM1000" DECAWAVE_DWM1000 12.5,9.2 r90 top

## Footprints (in the part's own frame and the unit in brackets; to place one, negate y for a bottom-side part, rotate by r counter-clockwise, add the part's x,y. Pads: shape width x height; smd on the part's side, far side on the other; paste and mask are expansions set on the pad)
ACCU_PORT [mm] "Cable Solder Holes"
  rect 1.455x1.455 hole 1: 1(0,1.27)
  round 1.45 hole 1: 2(0,-1.27)
CAPC1005X50 [mm] "Chip Capacitor; 1.0x0.5mm"
  rect 0.6x0.62 smd: 1(-0.48,0) 2(0.48,0)
  silkscreen extent 0,-0.3 0,0.3, body extent -0.5,-0.25 0.5,0.25, height 0.35
CAPC1608X80 [mm] "Chip Capacitor; 1.6x0.8mm"
  rect 0.95x1 smd: 1(-0.8,0) 2(0.8,0)
  silkscreen extent 0,-0.45 0,0.45, body extent -0.8,-0.4 0.8,0.4, height 0.8
DECAWAVE_DWM1000 [mm] "DecaWave DWM1000 module"
  rect 2.45x1 smd: 1(-6.295,0.8) 2(-6.295,-0.6) 3(-6.295,-2) 4(-6.295,-3.4) 5(-6.295,-4.8) 6(-6.295,-6.2) 7(-6.295,-7.6) 8(-6.295,-9) 17(6.295,-9) 18(6.295,-7.6) 19(6.295,-6.2) 20(6.295,-4.8) 21(6.295,-3.4) 22(6.295,-2) 23(6.295,-0.6) 24(6.295,0.8)
  rect 1x2.45 smd: 9(-4.9,-11.295) 10(-3.5,-11.295) 11(-2.1,-11.295) 12(-0.7,-11.295) 13(0.7,-11.295) 14(2.1,-11.295) 15(3.5,-11.295) 16(4.9,-11.295)
  silkscreen extent -8.66,-13.13 8.13,1.38, body extent -6.5,-11.47 6.5,11.53, height 2.9
DFN30X20X80-6 [mm] "LTC2941-1"
  rect 0.7x0.25 smd mask+0.08: 1(-1.425,0.5) 2(-1.425,0) 3(-1.425,-0.5) 4(1.425,-0.5) 5(1.425,0) 6(1.425,0.5)
  rect 1.65x1.35 smd mask+0.102: 7(0,0)
  silkscreen extent -2,-1.05 1.55,1.1, body extent -1.5,-1 1.5,1, height 0.8
HDR1X2_V_M [mm] "Connector; Header; 2 Position male"
  rect 1.455x1.455 hole 1: 1(0,0)
  round 1.45 hole 1: 2(2.54,0)
  silkscreen extent -1.27,-1.27 3.81,1.27, body extent -1.3,-1.3 3.8,1.3, height 8.3
HDRV70W12P40_2X35_Edison [mm] "Header for Intel Edison"
  round 2 hole 2 paste+0 mask+0: 0(-20.23,-18.3) 0(0.33,10.39)
  rect 1.14x0.2 smd paste-0.05 mask+0.02: 1(-1.32,6.8) 2(1.32,6.8) 3(-1.32,6.4) 4(1.32,6.4) 5(-1.32,6) 6(1.32,6) 7(-1.32,5.6) 8(1.32,5.6) 9(-1.32,5.2) 10(1.32,5.2) 11(-1.32,4.8) 12(1.32,4.8) 13(-1.32,4.4) 14(1.32,4.4) 15(-1.32,4) 16(1.32,4) 17(-1.32,3.6) 18(1.32,3.6) 19(-1.32,3.2) 20(1.32,3.2) 21(-1.32,2.8) 22(1.32,2.8) 23(-1.32,2.4) 24(1.32,2.4) 25(-1.32,2) 26(1.32,2) 27(-1.32,1.6) 28(1.32,1.6) 29(-1.32,1.2) 30(1.32,1.2) 31(-1.32,0.8) 32(1.32,0.8) 33(-1.32,0.4) 34(1.32,0.4) 35(-1.32,0) 36(1.32,0) 37(-1.32,-0.4) 38(1.32,-0.4) 39(-1.32,-0.8) 40(1.32,-0.8) 41(-1.32,-1.2) 42(1.32,-1.2) 43(-1.32,-1.6) 44(1.32,-1.6) 45(-1.32,-2) 46(1.32,-2) 47(-1.32,-2.4) 48(1.32,-2.4) 49(-1.32,-2.8) 50(1.32,-2.8) 51(-1.32,-3.2) 52(1.32,-3.2) 53(-1.32,-3.6) 54(1.32,-3.6) 55(-1.32,-4) 56(1.32,-4) 57(-1.32,-4.4) 58(1.32,-4.4) 59(-1.32,-4.8) 60(1.32,-4.8) 61(-1.32,-5.2) 62(1.32,-5.2) 63(-1.32,-5.6) 64(1.32,-5.6) 65(-1.32,-6) 66(1.32,-6) 67(-1.32,-6.4) 68(1.32,-6.4) 69(-1.32,-6.8) 70(1.32,-6.8)
  silkscreen extent -21.7,-23.13 3.3,12.37, body extent -21.79,-23.25 3.29,12.31, height 5.51
INDM2929X140 [mm] "coilcraft inductor lps3015"
  rect 0.635x0.635 smd paste+0 mask+0: 1(-1.27,0) 2(1.27,0)
  Top Layer region: 0.508,-1.524 0.508,-0.889 0.889,-0.508 0.889,0.508 0.508,0.889 0.508,1.524 1.397,1.524 1.651,1.27 1.651,-1.27 1.397,-1.524
  Top Layer region: -1.651,-1.27 -1.397,-1.524 -0.508,-1.524 -0.508,-0.889 -0.889,-0.508 -0.889,0.508 -0.508,0.889 -0.508,1.524 -1.397,1.524 -1.651,1.27
  silkscreen extent -0.33,-1.52 0.33,1.52, body extent -1.47,-1.47 1.47,1.47, height 1.4
LEDM1608X80 [mm] "LED; 1.6x0.8mm"
  rect 0.8x0.8 smd: 1(-0.75,0) 2(0.75,0)
  silkscreen extent -0.15,-0.2 0.15,0.2, body extent -0.8,-0.4 0.8,0.4, height 0.5
MOLEX_0473460001 [mm] "Molex USB Micro B"
  rect 1.38x0.4 smd paste-0.08: 1(2.975,1.3) 2(2.975,0.65) 3(2.975,0) 4(2.975,-0.65) 5(2.975,-1.3)
  rect 1.9x2.35 smd: 6(0.325,-2.925) 6(0.325,2.925)
  rect 1.9x1.15 smd: 6(0.325,-0.825) 6(0.325,0.825)
  rect 2.1x1.45 smd: 6(2.625,-2.475) 6(2.625,2.475)
  silkscreen extent -0.87,-4.38 4,4.38, body extent -1.78,-3.99 3.65,3.99, height 2.72
PLCC160P350X280X190-4 [mm]
  rect 1.4x1.1 smd: 1(-1.5,0.8) 2(-1.5,-0.8) 3(1.5,-0.8) 4(1.5,0.8)
  silkscreen extent -2.23,-1.4 0.5,2.07, body extent -1.75,-1.4 1.75,1.4, height 1.9
QFN40P40X40X80-29 [mm] "TQFN28-EP, T2844+1, MAX8934"
  oval 0.75x0.2 smd: 1(-1.925,1.2) 2(-1.925,0.8) 3(-1.925,0.4) 4(-1.925,0) 5(-1.925,-0.4) 6(-1.925,-0.8) 7(-1.925,-1.2) 15(1.925,-1.2) 16(1.925,-0.8) 17(1.925,-0.4) 18(1.925,0) 19(1.925,0.4) 20(1.925,0.8) 21(1.925,1.2)
  oval 0.2x0.75 smd: 8(-1.2,-1.925) 9(-0.8,-1.925) 10(-0.4,-1.925) 11(0,-1.925) 12(0.4,-1.925) 13(0.8,-1.925) 14(1.2,-1.925) 22(1.2,1.925) 23(0.8,1.925) 24(0.4,1.925) 25(0,1.925) 26(-0.4,1.925) 27(-0.8,1.925) 28(-1.2,1.925)
  rect 2.6x2.6 smd: 29(0,0)
  silkscreen extent -2.97,-2.2 2.2,2.2, body extent -2.05,-2.05 2.05,2.05, height 0.8
QFN50P40X40X80-21 [mm] "FT231XQ"
  oval 0.8x0.25 smd: 1(-2,1) 2(-2,0.5) 3(-2,0) 4(-2,-0.5) 5(-2,-1) 11(2,-1) 12(2,-0.5) 13(2,0) 14(2,0.5) 15(2,1)
  oval 0.25x0.8 smd: 6(-1,-2) 7(-0.5,-2) 8(0,-2) 9(0.5,-2) 10(1,-2) 16(1,2) 17(0.5,2) 18(0,2) 19(-0.5,2) 20(-1,2)
  rect 2x2 smd paste-1: 21(0,0)
  silkscreen extent -3,-2.22 2.23,2.23, body extent -2.07,-2.07 2.08,2.08, height 0.8
QFN50P47X37X100-21 [mm] "VQFN, TXB0108RGYR"
  oval 0.28x0.85 smd paste-0.025 mask+0.07: 1(-0.75,2.225) 10(-0.75,-2.225) 11(0.75,-2.225) 20(0.75,2.225)
  oval 0.85x0.28 smd paste-0.025 mask+0.07: 2(-1.725,1.75) 3(-1.725,1.25) 4(-1.725,0.75) 5(-1.725,0.25) 6(-1.725,-0.25) 7(-1.725,-0.75) 8(-1.725,-1.25) 9(-1.725,-1.75) 12(1.725,-1.75) 13(1.725,-1.25) 14(1.725,-0.75) 15(1.725,-0.25) 16(1.725,0.25) 17(1.725,0.75) 18(1.725,1.25) 19(1.725,1.75)
  rect 0.3x0.3 smd paste-0.15 mask+0: 21(0,0)
  Top Layer region: 0.16,2.65 0.16,1.925 -0.16,1.925 -0.16,2.65 -0.39,2.65 -0.39,1.525 -1.025,1.525 -1.025,-1.525 -0.39,-1.525 -0.39,-2.65 -0.16,-2.65 -0.16,-1.925 0.16,-1.925 0.16,-2.65 0.39,-2.65 0.39,-1.525 1.025,-1.525 1.025,1.525 0.39,1.525 0.39,2.65
  silkscreen extent -1.97,-2.48 1.98,3.25, body extent -1.82,-2.33 1.83,2.32, height 1
RESC1005X35 [mm] "Chip Resistor; 1x0.5mm"
  rect 0.6x0.62 smd: 1(-0.48,0) 2(0.48,0)
  silkscreen extent -0.1,-0.25 0.1,0.25, body extent -0.5,-0.25 0.5,0.25, height 0.35
SON50P210X210X80-9 [mm] "WSON8TP, TPS62162"
  rect 0.5x0.28 smd paste-0.14 mask+0.07: 1(-0.95,0.75) 2(-0.95,0.25) 3(-0.95,-0.25) 4(-0.95,-0.75) 5(0.95,-0.75) 6(0.95,-0.25) 7(0.95,0.25) 8(0.95,0.75)
  rect 0.9x1.6 smd paste-0.45 mask+0.07: 9(0,0)
  silkscreen extent -1.5,-1.2 1.05,1.25, body extent -1.05,-1.05 1.05,1.05, height 0.8
SON50P310X310X100-11 [mm] "VSON10, TPS61202"
  oval 0.85x0.28 smd paste-0.025 mask+0.07: 1(-1.475,1) 2(-1.475,0.5) 3(-1.475,0) 4(-1.475,-0.5) 5(-1.475,-1) 6(1.475,-1) 7(1.475,-0.5) 8(1.475,0) 9(1.475,0.5) 10(1.475,1)
  rect 1.65x2.4 smd paste-0.825 mask+0.07: 11(0,0)
  Top Layer region: -0.39,1.9 -0.11,1.9 -0.11,1.2 -0.39,1.2
  Top Layer region: 0.39,1.2 0.11,1.2 0.11,1.9 0.39,1.9
  Top Layer region: 0.39,-1.9 0.11,-1.9 0.11,-1.2 0.39,-1.2
  Top Layer region: -0.39,-1.2 -0.11,-1.2 -0.11,-1.9 -0.39,-1.9
  silkscreen extent -2.15,-1.7 1.7,1.7, body extent -1.55,-1.55 1.55,1.55, height 1
SOT95P360X130-6 [mm] "3 Pin"
  rect 0.7x1 smd: 1(-0.95,-1.3) 2(0,-1.3) 3(0.95,-1.3) 4(0.95,1.3) 5(0,1.3) 6(-0.95,1.3)
  silkscreen extent -2.05,-2.12 1.63,2.12, body extent -1.46,-1.42 1.46,1.42, height 1.1
SOT190P360X120-3 [mm] "3 Pin"
  rect 1x1.4 smd: 1(-0.95,-1.1) 2(0.95,-1.1) 3(0,1.1)
  silkscreen extent -1.28,-0.05 1.28,1.1, body extent -1.5,-1.25 1.5,1.25, height 1.1
SW_7914J-1-000E [mm] "BOURNS 7914J-001-000"
  rect 1.27x1.78 smd: 1(-1.275,1.9) 1(-1.275,-1.9) 2(1.275,1.9) 2(1.275,-1.9)
  silkscreen extent -2.37,-2.25 2.43,2.25, body extent -2.5,-2.5 2.5,2.5, height 4
TP_THT [mm] "TestPoint, suitable for soldering"
  round 1.45 hole 1: 1(0,0)

## Part data
C1 C3 C5 C7 C9 C12 C60 C61: library part Capacitor, "Capacitor SMD Ceramic X7R"
C2 C6 C50 C51 C52 C53 C100 C101 C110 C111: library part Capacitor, "Capacitor SMD"
C4 C8 C10 C11: library part Capacitor, "Capacitor SMD Ceramic X7R Low ESR"
D1 D40 D50: library part LED_green, "Light Emitting Diode"
D2 D4 D42 D51: library part LED_red, "Light Emitting Diode"
D3: library part LED_blue, "Light Emitting Diode"
D5 D52: library part LED_yellow, "Light Emitting Diode"
D6 D41 D53: library part LED_orange, "Light Emitting Diode"
D20: library part LED_RGB_CA, "RGB LED with common Anode"
J1 R15: library part PORT_THT, "2-Pin THT Port"
J2: library part ACCU_PORT, "Accu Port"
J3 J4: library part USB_micro_B, "USB Connectors MICRO USB B RECPT"
JP1: "Jumper"
L1 L2: library part L, "Inductor"
P1: library part "Intel Edison Header", "Intel Edison Header, 70-Pin Dual row"
Q1 Q20 Q21 Q22 Q40 Q41 Q42 Q50: "N-Channel MOSFET"
R1 R2 R3 R4 R5 R6 R7 R8 R9 R10 R11 R12 R13 R14 R20 R21 R22 R30 R31 R40 R41 R50 R51 R52 R53 R54 R55 R56 R57 R58 R59 R60 R61 R62 R100 R101 R102 R103 R104 R105 R106 R108 R109 R110 R111 R114 R115 R116 R117 R118 R119 R120 R121 R122 R123 R124 R125 R130 R131 R132 R140 R141 R142 R143 R144 R145 R150 R151 R152 R153 R154 R155 R156 R157 R200 R201 R202 R203 R204 R205 R206: library part Resistor, "Resistor"
S2 S30 S31 S32: "Switch PB"
TP1 TP2 TP3 TP4 TP5 TP100 TP101 TP102 TP103 TP104 TP105 TP106 TP107 TP108 TP109 TP110 TP111: library part TP1, "Test-Point"
U1: "IC BATTERY CHARGER DUAL 28TQFN"
U2: "IC FUEL/GAS GAUGE LI-ION 1A 6DFN"
U3: "IC REG BUCK 3.3V 1A SYNC 8WSON"
U4: "IC REG BOOST 5V 1.2A SYNC 10SON"
U5: "IC USB SERIAL FULL UART 20QFN"
U6: library part MIC2039, "Adjustable Current Limit Power Switch"
U10 U11: "8-Bit Bidirectional Voltage-Level Translator"
U50: "MOD IEEE802.15.4-2011 UWB TXRX"

## Via types
v1: diameter 0.55, hole 0.15, Top Layer to Bottom Layer, 287 vias
v2: diameter 0.95, hole 0.5, Top Layer to Bottom Layer, 6 vias
v3: diameter 0.55/0.55/0.55/0.55 (per signal layer), hole 0.15, Top Layer to Bottom Layer, 1 vias

## Nets (pads, with @x,y where several pads share a name; then routed paths per layer and width w, separated by ;. In a path a pad name is that pad's centre, name@x,y a point inside that pad or via, vN(x,y) a via of type N, cw(c..) or ccw(c..) an arc to the next point about the centre after c; other vN are vias at no path point)
1V8: C51.2 C100.2 C110.2 P1.12 R62.1 R100.2 R118.1 R119.1 R130.1 R131.1 R132.1 R200.1 TP3.1 U5.11 U5.20 U10.2 U11.2 | length 104.9
  Top Layer w0.2: P1.12@49.52,29 50.5,29 v1(50.6,29.1)
  Top Layer w0.25: R130.1@16.8,28.28 R131.1@17.9,28.28 R132.1@19,28.28 19.39,28.28 v1(19.812,28.702) ; v1(29.3,15.6) 29.3,15.607 30.893,17.2 34.9,17.2 ; v1(33.147,9.652) 34.3,10.805 34.3,16.6 34.9,17.2 ; U10.2@34.125,4.55 35.95,4.55 v1(36.1,4.4) ; v1(39.3,18.3) 39.3,17.18 ; U11.2@39.325,20.15 40.03,20.15 C110.2@40.4,19.78 42,18.18 R119.1@42,17.18 ; v1(46.2,16.9) 44.22,16.9 R200.1@44.2,16.92 43.36,16.92 R118.1@43.1,17.18 R119.1@42,17.18 ; 34.9,17.2 37.9,17.2 37.92,17.18 39.3,17.18 ; 39.3,17.18 R119.1@42,17.18
  Mid-Layer 3 w0.2: v1(19.812,28.702) 17.653,28.702 16.002,27.051 16.002,25.781 16.764,25.019 23.114,25.019 24.13,24.003 24.13,19.05 25.4,17.78 28.575,17.78 29.3,17.055 v1(29.3,15.6)
  Bottom Layer w0.2: v1(29.3,15.6) 29.7,15.2 U5.11@30,15.2 ; U5.20@33,12.2 C51.2@34.08,12.2 ; v1(46.2,16.9) 48.65,16.9 49.276,17.526 49.276,27.776 v1(50.6,29.1)
  Bottom Layer w0.25: C51.2@34.3,12.08 33.147,10.927 v1(33.147,9.652) 33.147,8.636 34.036,7.747 34.036,5.334 34.97,4.4 v1(36.1,4.4) ; R62.1@37.92,25.2 37.92,24.48 38.9,23.5 38.9,20.6 38.5,20.2 38.5,19.1 v1(39.3,18.3)
  Bottom Layer w0.5: TP3.1@32.385,1.905 33.655,3.175 34.925,3.175 v1@36.1,4.35
3V3: C8.2 C101.2 C111.2 D5.1 D6.1 D20.2 D40.1 D41.1 D42.1 L1.2 R20.1 R21.1 R22.1 R31.2 TP4.1 U3.6 U10.19 U11.19 U50.5 U50.6 U50.7 | length 23.5
  Top Layer w0.25: v1(28.3,3.7) 28.92,3.7 29.77,4.55 U10.19@30.675,4.55 ; v2@34.02,19.78 C111.2@34.8,19.78 35.17,20.15 U11.19@35.875,20.15
  Top Layer w0.4: D40.1@2.8,29.45 D41.1@5,29.45 D42.1@7.2,29.45 v1@8.35,29.45 ; D20.2@14.6,29.6 v1(14.6,30.2) ; v1(38,32.8) 38,33.5 39.4,34.9 41.9,34.9 D5.1@42.7,35.7 D6.1@44.2,35.7
  Bottom Layer w0.1: R31.2@38.98,17.4 39.7,16.68 v1(39.7,16.6)
  Bottom Layer w0.25: v2@33.78,20.02 R22.1@33.78,20.6 34.18,20.6 R21.1@34.8,21.22 ; R20.1@34.8,23.22 35.5,23.92 v1(35.5,24.2) ; U3.6@39.75,15.95 v1@39.75,16.55
  other v1: 17.4,4.5 18.7,4.5 20,4.5 36.6,18.1 36.6,18.7 8.4,29.4
  other v2: 42,14.8 33.8,19.9
5V: C10.2 C61.2 P1.20 TP2.1 U4.2 U4.10 U6.1 | length 19.4
  Top Layer w0.2: P1.20@49.52,27.4 v1(50.625,27.4)
  Mid-Layer 2 w0.25: v2(44.1,28.4) 46.18,28.4 46.863,29.083 49.21,29.083 50.6,27.693 50.6,27.425 v1(50.625,27.4)
  Bottom Layer w0.25: C10.2@39.5,3.3 40.514,2.286 42.037,2.286 42.577,2.826 U4.10@42.577,6.298
  Bottom Layer w0.6: TP2.1@34.925,1.905 36.12,3.1 37.9,3.1
  other v1: 39.9,1.9 41.3,1.9
ALCC: P1.25 R22.2 R200.2 U2.5 | length 29.6
  Top Layer w0.1: R200.2@44.3,18.02 v1(44.3,18.6) ; v1(45.9,26.5) 46.2,26.2 P1.25@46.88,26.2
  Mid-Layer 2 w0.1: v1(38.5,18.3) 38.5,18.1 39.2,17.4 43.1,17.4 v1(44.3,18.6)
  Mid-Layer 3 w0.1: v1(44.3,18.6) 47.1,18.6 47.275,18.775 47.275,26.3 47.075,26.5 v1(45.9,26.5)
  Bottom Layer w0.1: R22.2@32.82,20.38 32.82,18.98 33.1,18.7 34.1,18.7 35.2,17.6 37.398,17.6 38.098,18.3 v1(38.5,18.3) ; R22.2@32.82,20.6 33.1,20.88 U2.5@33.1,21.675
CHG_DONE: P1.64 R118.2 U1.1 | length 40.3
  Top Layer w0.1: R118.2@43.1,16.22 47.92,16.22 48.5,16.8 v1(48.5,17.8) 48.5,18.2 48.9,18.6 P1.64@49.52,18.6
  Mid-Layer 2 w0.1: v1(35.3,16.3) 35.7,15.9 47.6,15.9 48.5,16.8 v1(48.5,17.8)
  Mid-Layer 3 w0.1: v1(26.9,25.8) 29.8,25.8 30.6,25 30.6,24.2 31,23.8 31.917,23.8 32.2,23.517 32.2,19.4 32.6,19 35,19 35.3,18.7 v1(35.3,16.3)
  Bottom Layer w0.1: U1.1@26.875,26.5 26.9,26.475 v1(26.9,25.8)
CHG_ON: P1.70 R7.1 R119.2 U1.22 | length 34.7
  Top Layer w0.1: v1(30.8,25.8) 30.8,28.1 R7.1@32.8,30.1 ; v1(36,16.6) 36.5,16.1 41.88,16.1 R119.2@42,16.22 42.45,15.77 43.472,15.77 43.602,15.9 49.2,15.9 49.475,16.175 49.475,17.355 P1.70@49.52,17.4
  Mid-Layer 3 w0.1: v1(30.8,25.8) 30.8,24.3 31.1,24 32,24 32.4,23.6 32.4,19.483 32.683,19.2 35.083,19.2 35.5,18.783 35.5,17.1 v1(36,16.6) v1@36,16.7
  Bottom Layer w0.1: U1.22@30,25.775 30.025,25.8 v1(30.8,25.8)
DCIN: P1.14 R14.2 | length 27
  Top Layer w0.1: R14.2@44.32,10.4 v1(45.2,10.4) ; P1.14@49.52,28.6 50.4,28.6 v1(50.6,28.4)
  Bottom Layer w0.1: v1(45.2,10.4) 44.7,10.9 44.7,14.5 45.3,15.1 50.7,15.1 51.2,15.6 51.2,18.1 49.8,19.5 49.8,27.6 v1(50.6,28.4)
DECA_EXTON: P1.52 U10.1 | length 32.4
  Top Layer w0.1: U10.1@33.15,4.075 33.325,3.9 v1(33.8,3.9) ; P1.52@49.52,21 v1(50.6,21)
  Mid-Layer 3 w0.1: v1(33.8,3.9) 37.2,3.9 37.6,4.3 37.6,8.7 38.4,9.5 43.507,9.5 44.5,10.493 44.5,14.583 45.417,15.5 47.783,15.5 49.6,17.317 49.6,20.3 50.3,21 v1(50.6,21)
DECA_IRQ: P1.56 U10.9 | length 28.9
  Top Layer w0.1: U10.9@34.125,8.05 35.45,8.05 37,6.5 v1(38.1,6.5) ; P1.56@49.52,20.2 v1(50.6,20.2)
  Mid-Layer 3 w0.1: v1(38.1,6.5) 38.1,8.8 38.6,9.3 43.59,9.3 44.7,10.41 44.7,14.5 45.5,15.3 47.866,15.3 49.8,17.234 49.8,19.4 v1(50.6,20.2)
DECA_RSTN: P1.50 U10.4 | length 29.9
  Top Layer w0.1: U10.4@34.175,5.5 34.37,5.5 34.67,5.2 v1(36.9,5.2) ; v1(48.6,21.4) P1.50@49.52,21.4
  Mid-Layer 3 w0.1: v1(36.9,5.2) 37.4,5.7 37.4,8.8 38.3,9.7 43.424,9.7 44.3,10.576 44.3,14.666 45.334,15.7 47.7,15.7 49.4,17.4 49.4,20.4 49.025,20.775 48.6,21.201 v1(48.6,21.4)
DECA_WU: P1.54 U10.3 | length 30.4
  Top Layer w0.1: U10.3@34.125,5.05 34.175,5 36.4,5 36.9,4.5 v1(36.9,4.4) ; v1(48.6,20.6) P1.54@49.52,20.6
  Mid-Layer 3 w0.1: v1(36.9,4.4) 36.4,4.9 36.4,5.4 37.2,6.2 37.2,8.883 38.217,9.9 43.341,9.9 44.1,10.659 44.1,14.749 45.251,15.9 47.6,15.9 49.2,17.5 49.2,20 v1(48.6,20.6)
DWM_EXTON: U10.20 U50.1 | length 25
  Top Layer w0.1: U50.1@11.7,1.8 U50.1@11.7,2.905 v1(11.7,4.7) ; v1(31.65,3.2) U10.20@31.65,4.075
  Mid-Layer 2 w0.1: v1(11.7,4.7) 11.7,3.7 12.325,3.075 31.525,3.075 v1(31.65,3.2)
DWM_IRQ: U10.12 U50.22 | length 27.7
  Top Layer w0.1: v1(14.2,13.8) U50.22@14.2,15.195 ; v1(29.7,8.8) 29.7,8.383 30.033,8.05 U10.12@30.675,8.05
  Mid-Layer 2 w0.1: v1(14.2,13.8) 13.6,13.8 13.2,13.4 13.2,7.417 13.917,6.7 26.801,6.7 28.901,8.8 v1(29.7,8.8)
DWM_RSTN: Q50.1 U10.17 | length 10
  Top Layer w0.1: v1(29.8,5.6) 29.85,5.55 U10.17@30.675,5.55
  Bottom Layer w0.1: Q50.1@21.75,7.2 28.8,7.2 29.3,6.7 29.3,6.1 v1(29.8,5.6)
DWM_WAKEUP: U10.18 U50.2 | length 23.2
  Top Layer w0.1: U50.2@13.1,1.8 U50.2@13.1,2.905 v1(13.1,4.7) ; v1(29.45,5.05) U10.18@30.675,5.05
  Mid-Layer 2 w0.1: v1(13.1,4.7) 13.1,3.7 13.525,3.275 29,3.275 29.45,3.725 v1(29.45,5.05)
ENA3V3: P1.48 R203.1 R204.1 U3.3 | length 27.1
  Top Layer w0.1: R204.1@36.38,9.7 R203.1@37.42,9.699 ; R204.1@36.4,9.72 36.4,12.3 37.3,13.2 v1(39.6,13.2) ; P1.48@49.52,21.8 50.1,21.8 v1(50.6,22.3)
  Mid-Layer 2 w0.1: v1(39.6,13.2) 43.9,13.2 44.3,13.6 44.3,14.7 45.1,15.5 47.8,15.5 49.6,17.3 49.6,21.3 v1(50.6,22.3)
  Bottom Layer w0.1: v1(39.6,13.2) 39.75,13.35 U3.3@39.75,14.05
ENA5V: P1.42 R205.1 R206.1 U4.6 | length 33.9
  Top Layer w0.1: R205.1@36.38,8.6 R206.1@37.42,8.6 37.42,8.046 38.608,6.858 38.608,6.096 v1(38.1,5.588) ; P1.42@49.52,23 v1(50.6,23)
  Mid-Layer 2 w0.1: v1(38.1,5.588) 38.608,6.096 42.418,6.096 42.672,6.35 42.672,7.972 v1(43.4,8.7) 44.5,9.8 44.5,14.6 45.2,15.3 47.9,15.3 49.8,17.2 49.8,21.2 50.3,21.7 50.8,21.7 51.1,22 51.1,22.5 v1(50.6,23)
  Bottom Layer w0.1: U4.6@42.577,8.298 42.998,8.298 v1(43.4,8.7)
GND: C1.1 C2.1 C3.1 C4.1 C5.1 C6.1 C7.1 C8.1 C9.1 C10.1 C11.1 C12.1 C50.1 C51.1 C52.1 C53.1 C60.1 C61.1 C100.1 C101.1 C110.1 C111.1 D50.2 D51.2 D52.2 D53.2 J1.2 J2.2 J3.5 J3.6 J4.5 J4.6 P1.1 P1.5 P1.9 P1.11 P1.13 P1.15 Q20.2 Q21.2 Q22.2 Q40.2 Q41.2 Q42.2 Q50.2 R1.2 R2.2 R3.1 R10.2 R15.2 R41.1 R60.2 R61.2 R123.2 R124.2 R125.2 R143.2 R144.2 R145.2 R201.2 R202.2 R204.2 R205.2 S2.2 S30.1 S31.1 S32.1 TP5.1 U1.4 U1.9 U1.12 U1.13 U1.29 U2.2 U3.1 U3.4 U3.5 U3.9 U4.4 U4.9 U4.11 U5.3 U5.13 U5.21 U6.2 U10.11 U10.21 U11.11 U11.21 U50.8 U50.16 U50.21 U50.23 U50.24 | length 61.6
  Top Layer w0.2: U50.8@21.5,2.905 v1(21.5,4.8) ; v1(34.3,9.7) R204.2@35.42,9.7 ; R10.2@36.405,35.8 v1(37.4,35.8)
  Top Layer w0.25: U10.11@31.65,8.525 31.65,7.55 v1(31.9,7.3) ; U11.11@36.85,24.125 36.85,23.15 v1(37.1,22.9) ; v1(40.4,15) 40.9,15.5 42.331,15.5 42.336,15.495 42.905,15.495 43.9,14.5 46.7,14.5 47.18,14.98 R201.2@47.18,15.1
  Top Layer w0.4: R205.2@35.42,8.6 R204.2@35.42,9.7 ; R201.2@47.18,15.1 R202.2@48.82,15.1
  Mid-Layer 3 w0.5: v1(29.55,26.95) 31.55,26.95 32.1,26.4 v1(34.4,26.4) ; v1(37.1,22.9) v1(38.1,22.9) 39.1,22.9 40.2,24 v1(40.2,24.8)
  Bottom Layer w0.1: v1(26.4,9.7) C53.1@26.4,10.52
  Bottom Layer w0.2: Q22.2@11.4,9.75 v1(11.4,8.8) 11.7,8.5 R125.2@12.02,8.5 ; Q21.2@14.8,9.75 v1(14.8,8.8) 15.1,8.5 R124.2@15.42,8.5 ; Q20.2@18.2,9.75 v1(18.2,8.8) 18.5,8.5 R123.2@18.82,8.5 ; U1.4@26.875,27.7 U1.29@28.8,27.7 ; U1.29@28,28.5 U1.9@28,29.625 ; U1.29@29.2,28.1 U1.12@29.2,29.625 ; U1.29@29.6,28.5 U1.13@29.6,29.625 ; U5.3@31,11.2 U5.21@31,13.2 U5.13@31,15.2 ; v1(34.3,9.7) C51.1@34.3,11.12
  Bottom Layer w0.25: v1(15.9,15.1) 15.9,20.4 ; U2.2@33.1,24.525 33.1,25 33.48,25.38 C6.1@33.48,25.7 34.18,26.4 v1(34.4,26.4) ; U3.4@39.25,14.05 39.25,14.45 39.8,15 39.25,15.55 U3.5@39.25,15.95 ; U4.4@39.627,7.798 U4.11@40.401,7.798 ; U3.9@40.2,15 40.75,14.45 U3.1@40.75,14.05 ; U6.2@40.9,27.4 41.9,27.4 C61.1@42.6,26.7 ; U4.11@41.801,6.798 U4.9@42.577,6.798 43.922,6.798 R41.1@44.302,6.418 ; R61.2@42.28,25.2 C61.1@42.28,26.38
  other v1: 31.9,5.3 32.9,5.3 31.9,6.3 32.9,6.3 40.652,6.548 41.551,6.548 32.9,7.3 41.102,7.298 40.652,8.049 41.551,8.049 13.7,12.3 14.3,12.3 31,12.6 13.7,13 30.4,13.2 31.6,13.2 31,13.8 23.4,14.1 39.6,15 25.1,16.2 37.1,20.9 38.1,20.9 37.1,21.9 38.1,21.9 26.5,23.5 26.5,24.2 40.2,24.3 26.5,24.9 28.05,26.95 23.1,27.4 23.1,28 28.05,28.45 29.55,28.45 33.6,33 27.9,33.1 28.6,33.1 45.2,33.1 45.8,33.1 46.6,33.1 47.2,33.1 40.2,33.2 40.9,33.2 33.6,33.6 40.2,34.1 40.9,34.1 27.9,34.2 28.6,34.2 33.6,34.3 45.2,34.3 45.8,34.3 27.1,35.5 28.4,35.5 29.5,35.5 30.2,35.5 39.4,35.5 40.8,35.5 45.3,35.5 46.6,35.5 31.2,35.7 41.8,35.7 27.1,36.5 28.4,36.5 29.5,36.5 30.2,36.5 31.2,36.5 31.9,36.5 32.8,36.5 33.6,36.5 34.3,36.5 39.4,36.5 40.8,36.5 41.8,36.5 42.5,36.5 43.5,36.5 44.2,36.5 45.3,36.5 46.6,36.5
  other v3: 14.3,13
GPIO77: P1.60 U11.1 | length 11.9
  Top Layer w0.1: U11.1@38.35,19.675 39.025,19.675 v1(39.2,19.5) ; v1(48.5,19.1) 48.8,19.4 P1.60@49.52,19.4
  Mid-Layer 2 w0.1: v1(39.2,19.5) 43.1,19.5 43.5,19.9 44,19.9 44.5,19.4 48.2,19.4 v1(48.5,19.1)
GPIO78: P1.58 U11.3 | length 10.8
  Top Layer w0.1: U11.3@39.325,20.65 40.15,20.65 v1(40.2,20.7) ; v1(48.5,19.8) P1.58@49.52,19.8
  Mid-Layer 2 w0.1: v1(40.2,20.7) 40.8,20.1 44.083,20.1 44.583,19.6 48.3,19.6 v1(48.5,19.8)
I2C1_SCL: P1.41 U11.6 | length 8.5
  Top Layer w0.1: U11.6@39.325,22.15 39.649,22.15 41.199,23.7 43.401,23.7 43.825,23.276 ; 43.825,23.275 44.075,23.025 P1.41@46.855,23.025
I2C1_SDA: P1.43 U11.7 | length 9.2
  Top Layer w0.1: U11.7@39.325,22.65 39.85,22.65 41.1,23.9 43.9,23.9 v1(44.2,23.6) ; v1(44.2,22.6) P1.43@46.88,22.6
  Mid-Layer 3 w0.1: v1(44.2,22.6) v1(44.2,23.6)
I2C6_SCL: P1.45 U11.8 | length 17.9
  Top Layer w0.1: U11.8@39.325,23.15 40.05,23.15 41,24.1 43,24.1 v1(43.7,24.8) ; P1.45@46.88,22.2 47.6,22.2 v1(47.9,22.5)
  Mid-Layer 3 w0.1: v1(43.7,24.8) 43.6,24.8 43.1,25.3 43.1,26.8 43.5,27.2 47.4,27.2 47.7,26.9 47.7,22.7 v1(47.9,22.5)
I2C6_SDA: P1.47 U11.9 | length 16.6
  Top Layer w0.1: U11.9@39.325,23.65 40.25,23.65 40.9,24.3 42.5,24.3 v1(43.7,25.5) ; P1.47@46.88,21.8 v1(47.9,21.8)
  Mid-Layer 3 w0.1: v1(43.7,25.5) 43.7,26.8 43.9,27 47.3,27 47.475,26.825 47.475,22.225 v1(47.9,21.8)
I2C_GAUGE.SCL: R20.2 R114.2 R116.2 U2.3 | length 8.3
  Top Layer w0.1: v1(35.5,28.1) 35.5,27.18 R116.2@36.1,26.58 R114.2@37.2,26.58
  Bottom Layer w0.1: U2.3@33.6,24.525 34.325,24.525 ; R20.2@34.8,24.18 34.455,24.525 34.325,24.525 ; v1(35.5,28.1) 35.5,25.7 34.325,24.525
I2C_GAUGE.SDA: R21.2 R115.2 R117.2 U2.4 | length 15.1
  Top Layer w0.1: R117.2@32.5,26.58 33.05,26.58 ; R115.2@33.6,26.58 33.05,26.58 ; v1(35.3,28.9) 33.3,28.9 33.05,28.65 33.05,26.58
  Bottom Layer w0.1: U2.4@33.6,21.675 34.295,21.675 R21.2@34.8,22.18 ; R21.2@34.88,22.18 36.8,24.1 36.8,26.6 36.44,26.96 36.44,27.761 v1(35.3,28.9)
NetC1_2: C1.2 J1.1 U1.2 U1.3
NetC2_2: C2.2 U1.5 U1.6 U1.8 | length 5
  Bottom Layer w0.2: U1.5@26.875,28.1 U1.6@26.875,28.5 26.4,28.5 26.2,28.7 26.2,29.62 C2.2@27.38,30.8 27.6,30.58 U1.8@27.6,29.625
NetC3_2: C3.2 JP1.1 U1.23 U1.24
  other v2: 29.3,23.5
NetC11_2: C11.2 U4.1 U4.7 | length 8.9
  Mid-Layer 2 w0.1: v1(39.8,5.6) 43.2,5.6 43.5,5.9 v1(43.5,8)
  Bottom Layer w0.1: U4.7@42.577,7.798 43.298,7.798 v1(43.5,8)
  Bottom Layer w0.25: U4.1@39.627,6.298 39.8,6.125 v1(39.8,5.6) 39.8,5.32 C11.2@40.42,4.7
NetC12_2: C12.2 U1.10 | length 14.1
  Mid-Layer 3 w0.1: v1(26.3,20.7) 25.5,21.5 25.5,23.4 25.5,28.966 27.234,30.7 v1(28.3,30.7)
  Bottom Layer w0.1: C12.2@26.2,21.52 26.3,21.42 v1(26.3,20.7) ; v1(28.3,30.7) 28.3,30.5 28.4,30.4 U1.10@28.4,29.625
NetC52_2: C52.2 J3.2 R50.1 | length 30
  Top Layer w0.1: v1(28.9,19.4) 28,20.3 28,21 27.5,21.5 27.5,25.15 27.9,25.55 27.9,26.3 27.5,26.7 27.5,28.8 27.8,29.1 27.8,31.517 28.283,32 29.8,32 30.1,31.7 v1(30.1,31.3)
  Bottom Layer w0.1: R50.1@26.52,13.8 25.903,13.8 24.5,15.203 24.5,16.6 25.1,17.2 28.4,17.2 28.7,17.5 28.7,18.9 28.9,19.1 v1(28.9,19.4) ; R50.1@26.62,13.9 27.1,14.38 C52.2@27.1,14.92 C52.2@27.18,15 ; v1(30.1,31.3) J3.2@30.1,33.275
NetC53_2: C53.2 J3.3 R51.1 | length 31.1
  Top Layer w0.1: v1(28.2,19.4) 28.2,19.817 27.8,20.217 27.8,20.917 27.3,21.417 27.3,25.233 27.7,25.633 27.7,26.217 27.3,26.617 27.3,28.9 27.6,29.2 27.6,31.6 28.2,32.2 29.9,32.2 v1(30.8,31.3)
  Bottom Layer w0.1: C53.2@26.52,11.76 R51.1@26.52,12.7 ; R51.1@26.62,12.8 24.3,15.12 24.3,16.683 25.017,17.4 28.3,17.4 28.5,17.6 28.5,18.9 28.2,19.2 v1(28.2,19.4) ; v1(30.8,31.3) J3.3@30.8,33.225
NetC60_2: C60.2 J4.1 U6.6
NetD1_2: D1.2 R6.1 | length 1.1
  Top Layer w0.1: R6.1@34.6,33.08 D1.2@34.6,34.15
NetD2_2: D2.2 R8.2 | length 1.2
  Top Layer w0.1: D2.2@32.6,34.13 32.8,33.93 R8.2@32.8,33.06
NetD3_1: D3.1 R9.2 | length 1.1
  Top Layer w0.1: R9.2@36.35,31.145 D3.1@36.35,32.215
NetD3_2: D3.2 R10.1 | length 1.1
  Top Layer w0.1: D3.2@36.35,33.715 R10.1@36.35,34.785
NetD4_2: D4.2 R30.1 | length 1.1
  Bottom Layer w0.1: D4.2@38.1,14.35 R30.1@38.1,15.42
NetD5_2: D5.2 R54.1 | length 1.1
  Top Layer w0.1: R54.1@42.7,33.11 D5.2@42.7,34.2
NetD6_2: D6.2 R55.2 | length 1.1
  Top Layer w0.1: R55.2@44.2,33.13 D6.2@44.2,34.2
NetD20_1: D20.1 R120.2 | length 25.7
  Top Layer w0.1: D20.1@15.1,27.9 v1(15.9,27.9)
  Mid-Layer 2 w0.1: v1(15.9,27.9) 12.6,27.9 12.3,27.6 12.3,14.783 12.483,14.6 18,14.6 18.3,14.3 v1(18.3,12.7)
  Bottom Layer w0.1: v1(18.3,12.7) R120.2@18.3,13.28
NetD20_3: D20.3 R122.2 | length 18.9
  Top Layer w0.1: v1(10.7,28.9) D20.3@11.5,28.9
  Mid-Layer 2 w0.1: v1(10.7,28.9) 10.2,28.4 10.2,27.3 10.5,27 11,27 11.9,26.1 11.9,13.1 v1(11.5,12.7)
  Bottom Layer w0.1: v1(11.5,12.7) R122.2@11.5,13.28
NetD20_4: D20.4 R121.2 | length 19.9
  Top Layer w0.1: v1(10.7,27.9) D20.4@11.5,27.9
  Mid-Layer 2 w0.1: v1(10.7,27.9) 12.1,26.5 12.1,14.7 12.4,14.4 14.6,14.4 15.025,13.975 v1(15.025,12.625)
  Bottom Layer w0.1: v1(15.025,12.625) R121.2@15.025,13.405
NetD40_2: D40.2 R140.1 | length 11
  Top Layer w0.1: D40.2@2.8,27.95 2.85,27.9 v1(3.7,27.9)
  Bottom Layer w0.1: v1(3.7,27.9) 3.7,27.3 4,27 11,27 11.82,26.18 R140.1@11.82,25.3
NetD41_2: D41.2 R141.1 | length 11.6
  Top Layer w0.1: D41.2@5,27.95 5.05,27.9 v1(5.9,27.9)
  Bottom Layer w0.1: v1(5.9,27.9) 5.9,27.5 6.2,27.2 11.1,27.2 12.3,26 14.52,26 R141.1@15.22,25.3